# Altium PCB SmartHelmet.PcbDoc (part 1 of 2)
Units mm, origin at the board's own origin, x right, y up, seen from the top; angles counter-clockwise.
Board outline 33.86 x 37.02 mm, 6 copper layers (Top Layer, GND, SIGNAL, POWER, GND 2, Bottom Layer), stack 1.538 mm thick; 65 components, 48 nets, 312 pads, 182 vias.
Unrouted connection lines stored in the file: 104.
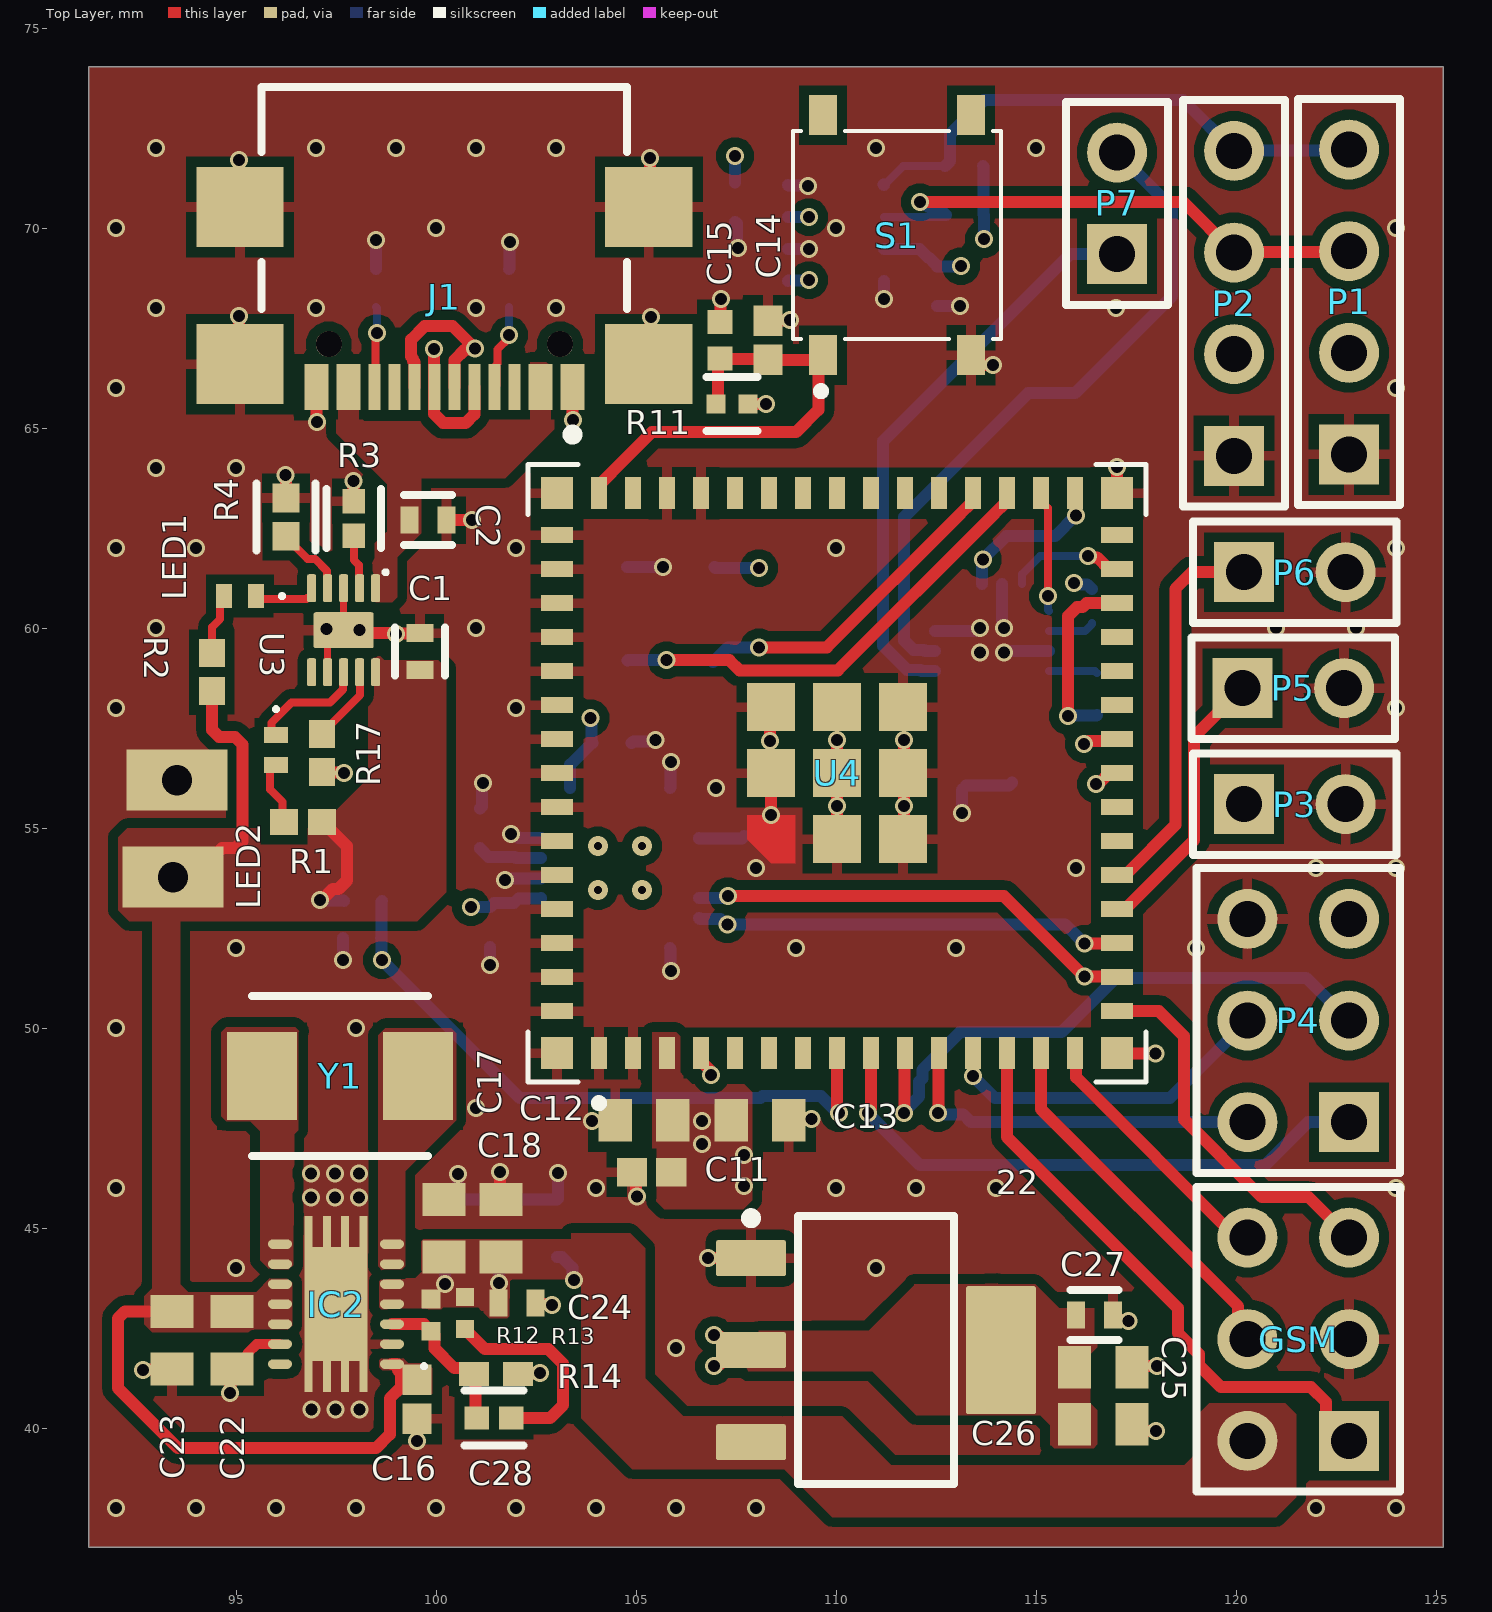
[diagram p0: Top Layer view]
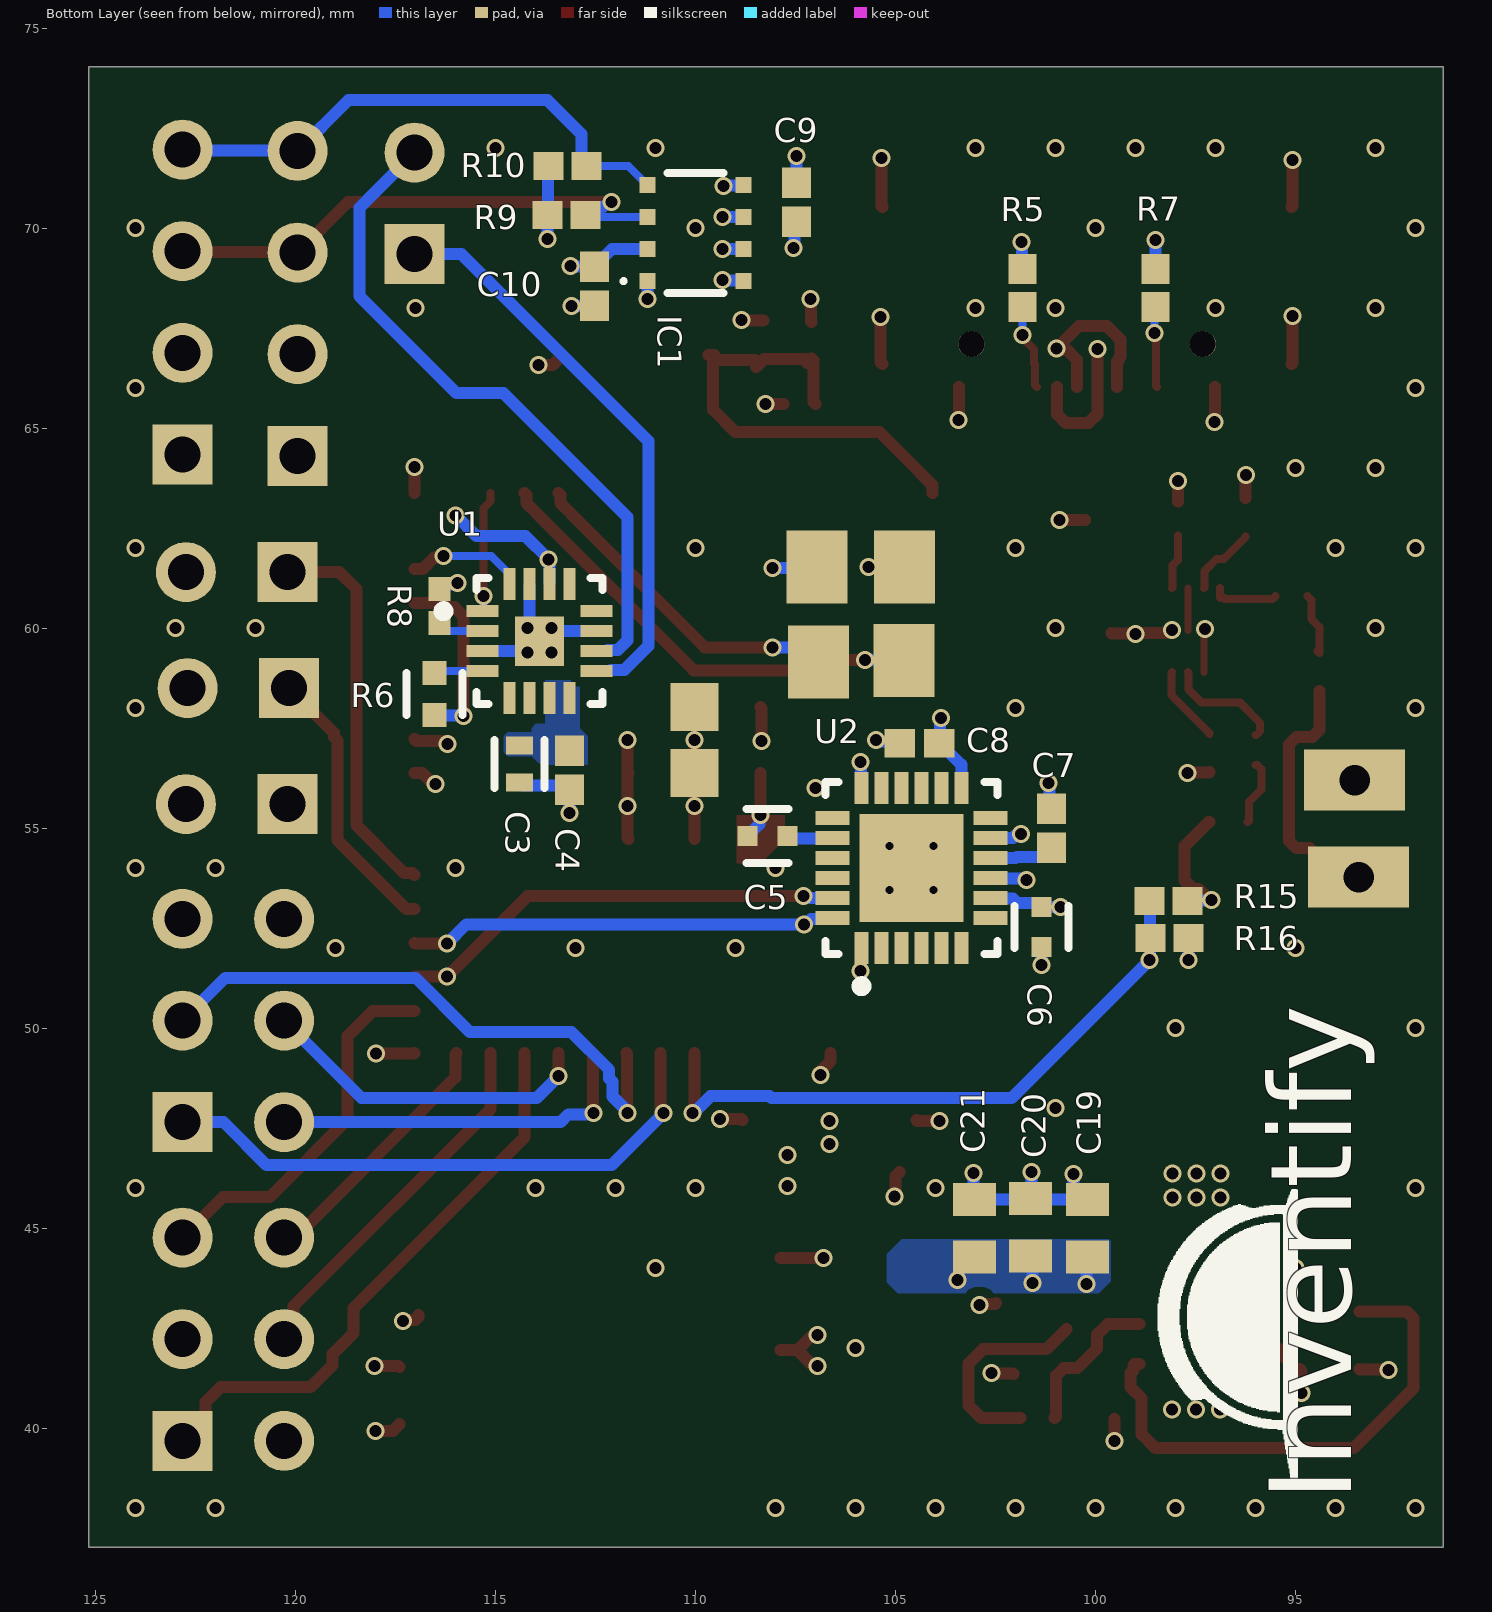
[diagram p1: Bottom Layer view, seen from below]
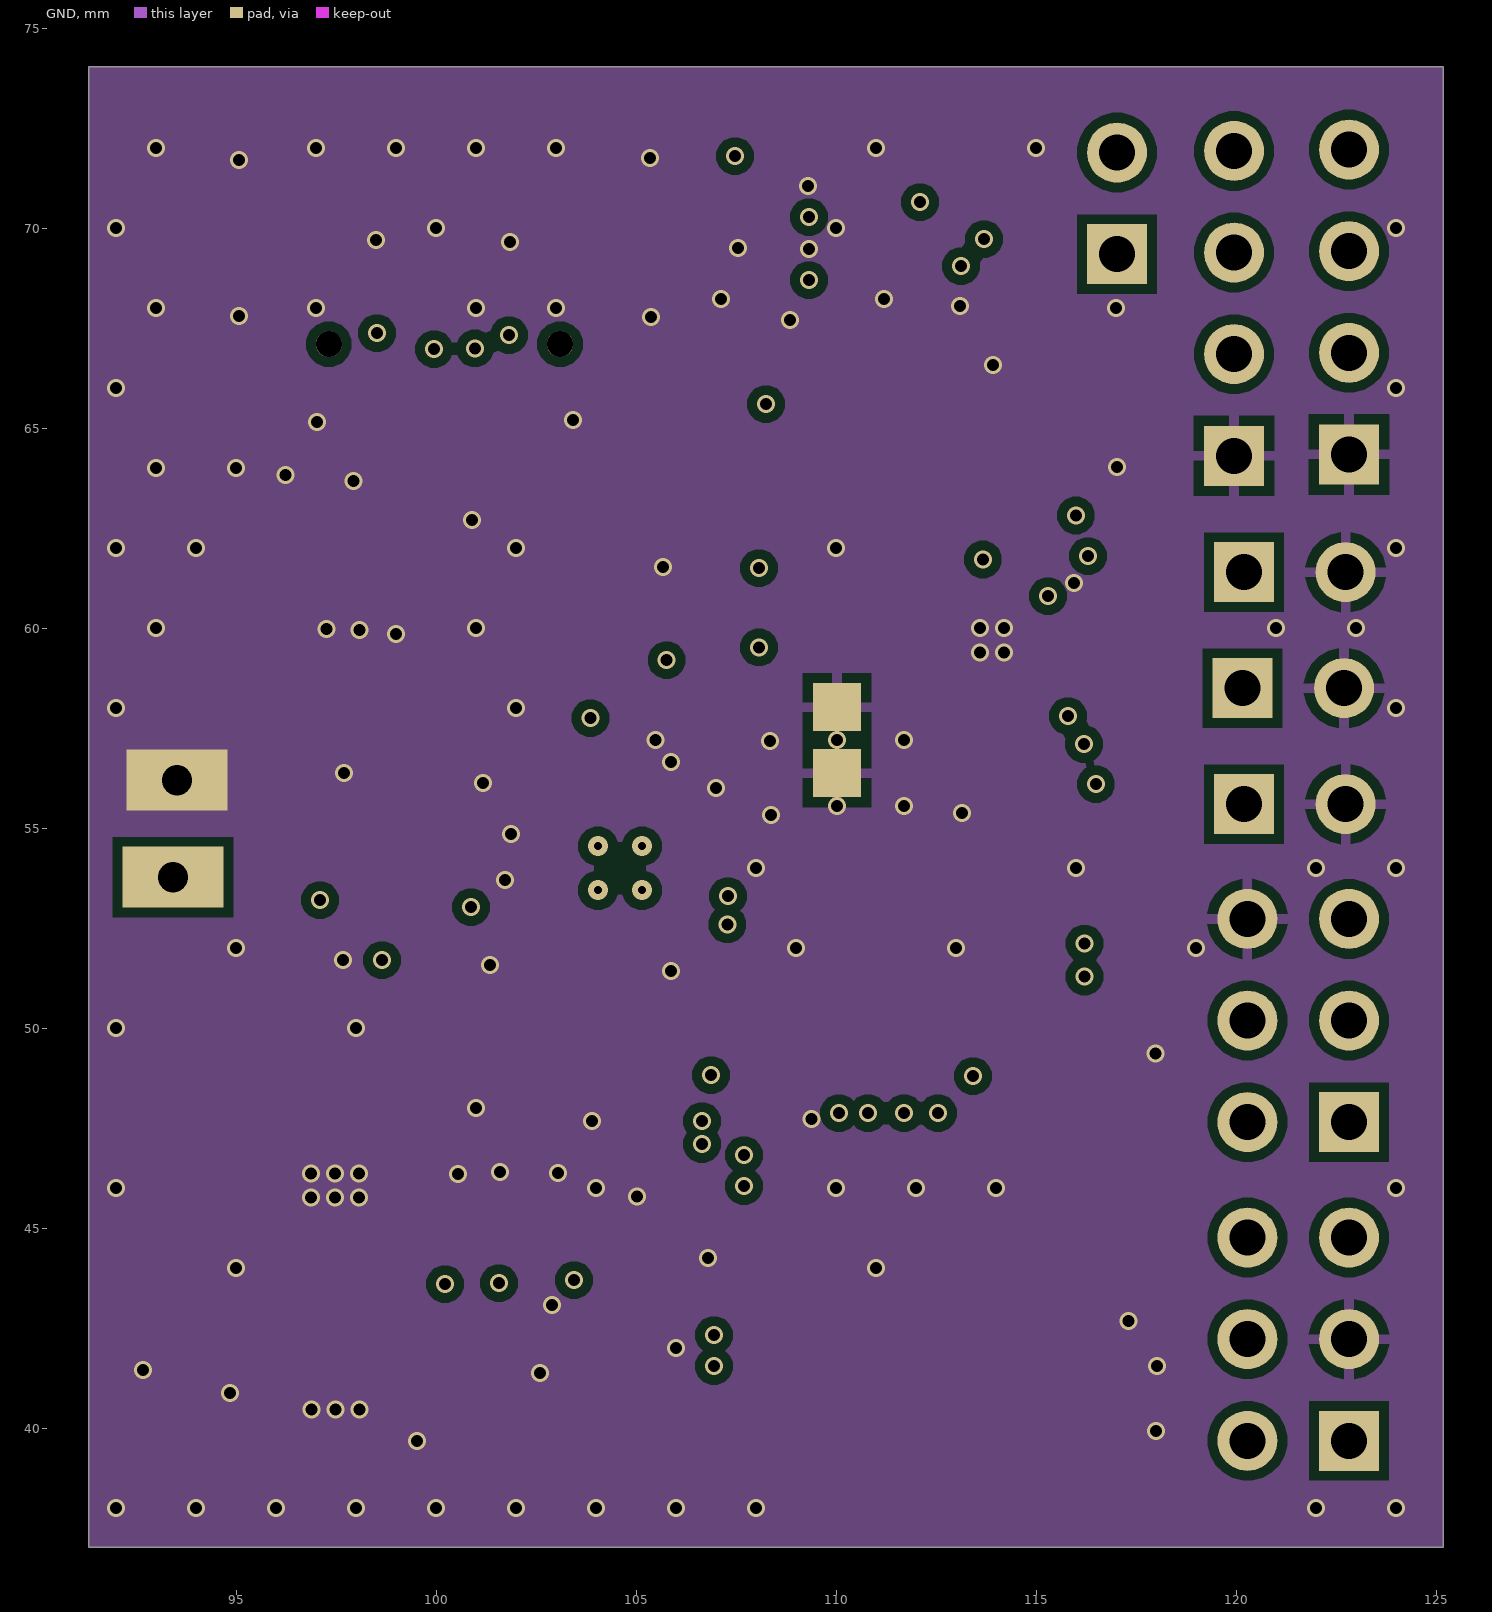
[diagram p2: GND]
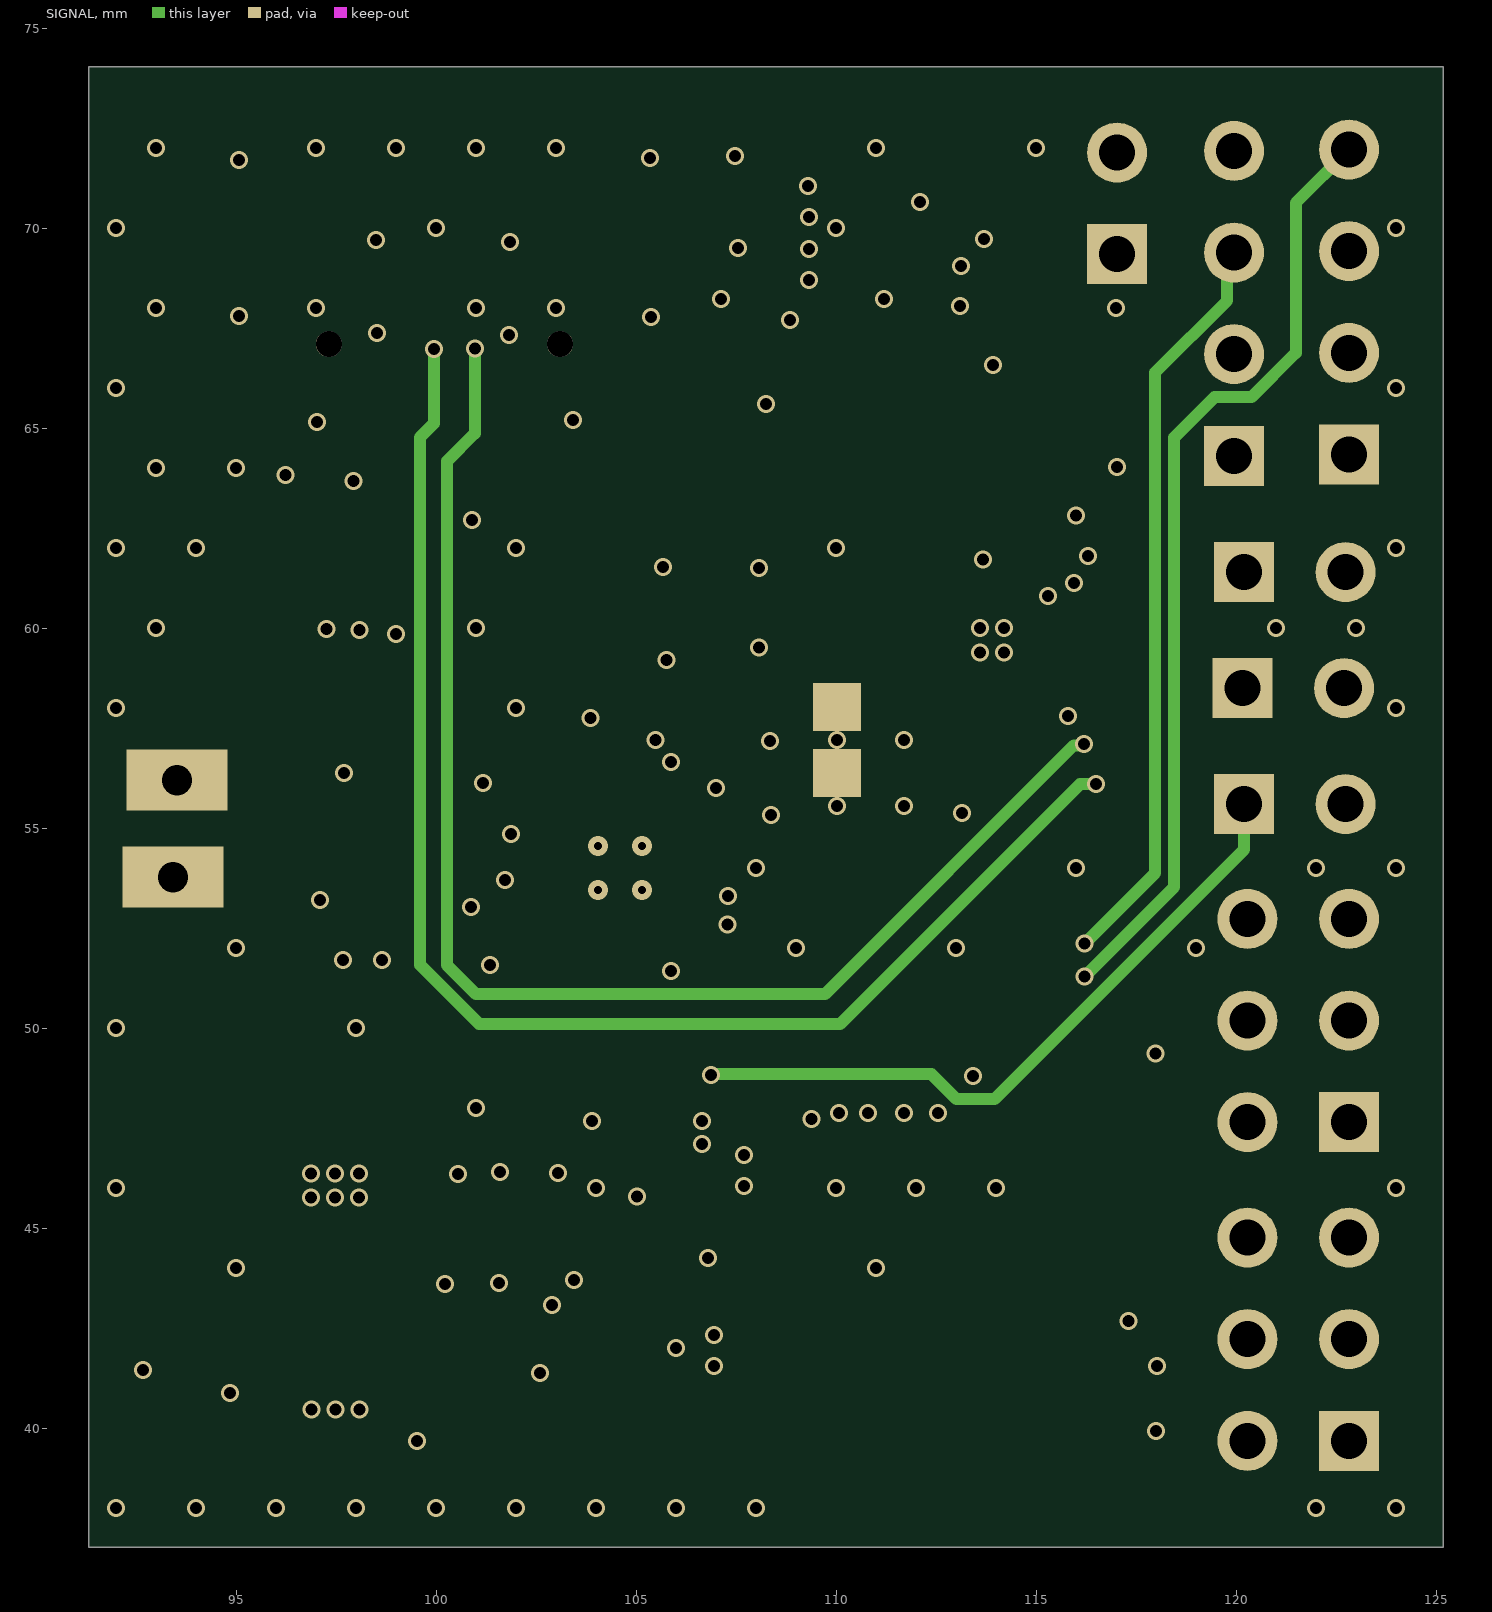
[diagram p3: SIGNAL]
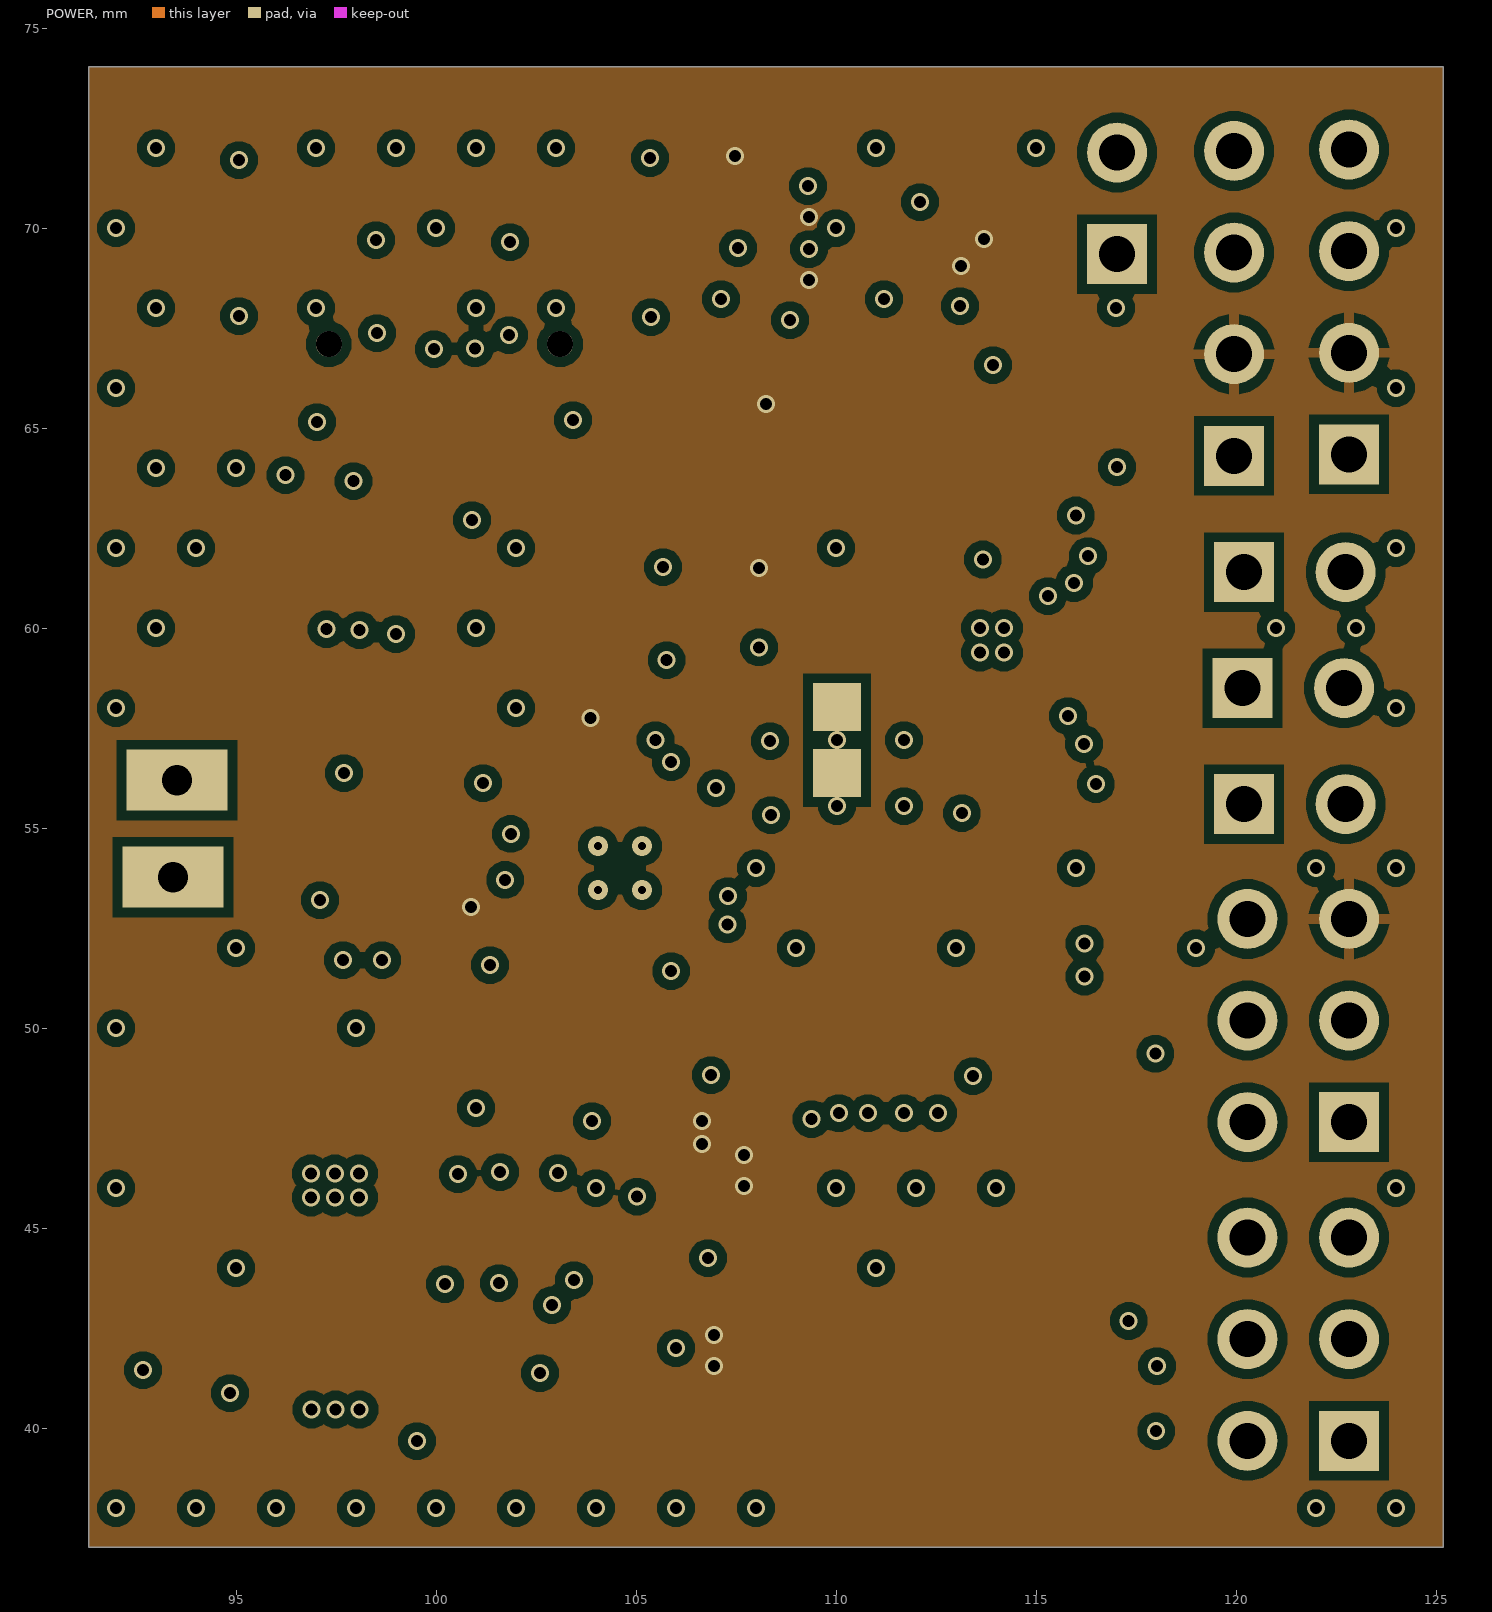
[diagram p4: POWER]
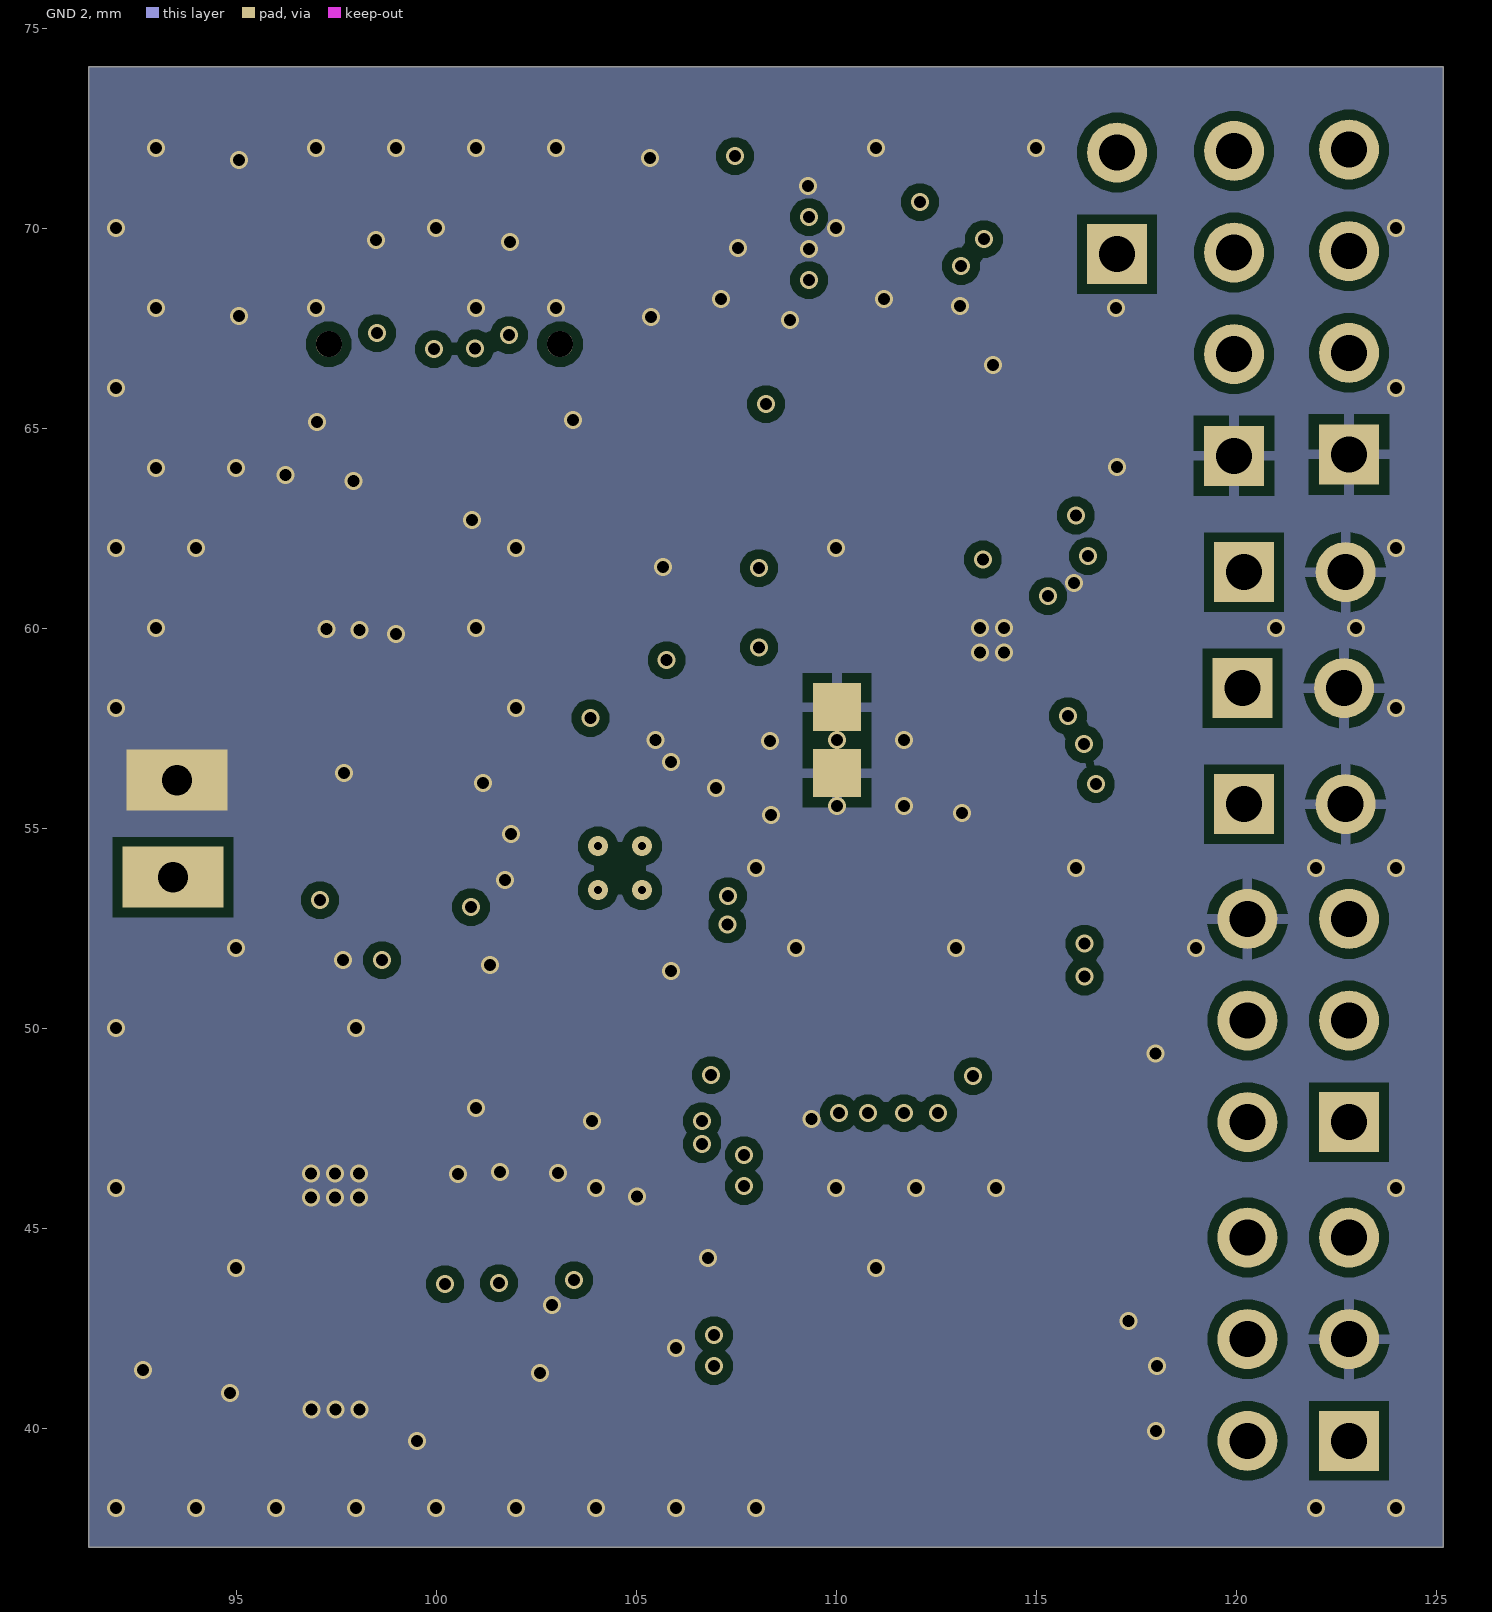
[diagram p5: GND 2]
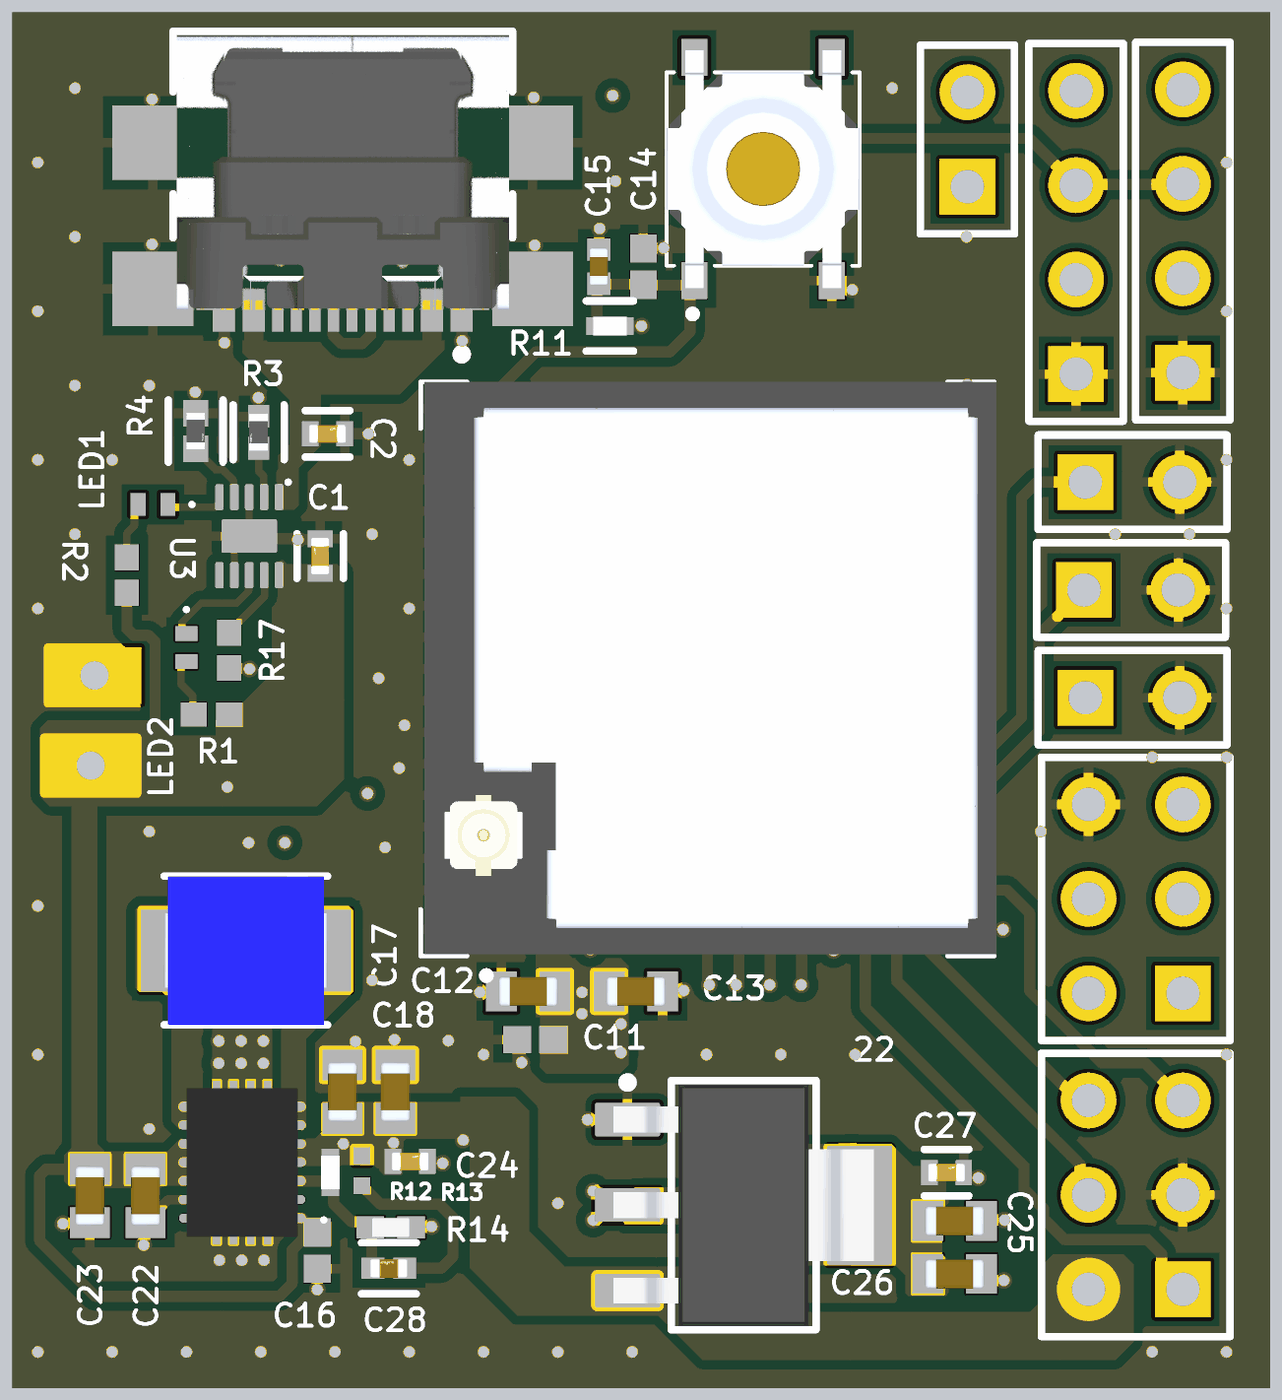
[diagram p6: 3D render of the assembled board from above, using the file's embedded part models]

## Layer stack, top to bottom
Top Solder: solder mask 0.0102, Solder Resist, Dk 3.8
Top Layer: signal copper 0.035
PREPREG1: prepreg 0.0994, PP-015, Dk 4.1
GND: signal copper 0.0152
CORE1: core 0.55, Core-009, Dk 4.6
SIGNAL: signal copper 0.0152
PREPREG2: prepreg 0.1088, PP-016, Dk 4.16
POWER: signal copper 0.0152
CORE2: core 0.55, Core-009, Dk 4.6
GND 2: signal copper 0.0152
PREPREG3: prepreg 0.0994, PP-015, Dk 4.1
Bottom Layer: signal copper 0.035
Bottom Solder: solder mask 0.0102, Solder Resist, Dk 3.8

## Board outline
91.313,37.025 125.175,37.025 125.175,74.041 91.313,74.041

## Design rules (kind name [scope] priority, off if disabled: settings)
Clearance "Stitching GND" [IsStitchingVia and InNet('GND') vs (IsVia and (Not IsStitchingVia)) Or IsPad] p1: gap=0.2 ignorepadtopadclearanceinfootprint=FALSE
Clearance [All] p2: gap=0.17 ignorepadtopadclearanceinfootprint=FALSE except(0.15: SMDPad-SMDPad; 0.2: Arc-Via Track-Via; 0.24: Arc-Fill Arc-Poly Arc-Region Track-Fill Track-Poly Track-Region SMDPad-Fill SMDPad-Poly SMDPad-Region THPad-Fill THPad-Poly THPad-Region Via-Fill Via-Poly Via-Region Fill-Fill Fill-Poly Fill-Region Poly-Poly Poly-Region Region-Region; 0.254: Via-Via)
ComponentClearance [All] p1: gap=0.1 collisioncheckmode=3 verticalgap=0.1 showdistances=FALSE
MinimumSolderMaskSliver [All] p1: minsoldermaskwidth=0.05
PolygonConnect [All] p1: connectstyle=Relief reliefconductorwidth=0.254 reliefentries=4 polygonreliefangle="90 Angle" airgapwidth=0.254
RoutingVias [All] p1: holewidth=0.711 width=1.27 viastyle="Through Hole" minholewidth=0.711 minwidth=1.27 maxholewidth=0.711 maxwidth=1.27
SolderMaskExpansion [All] p1: expansion=0.102 istentingtop=FALSE
Width [All] p1: maxlimit=0.3 minlimit=0.18 preferedwidth=0.2
28 further rules are at their usual default settings.

## Components (designator, comment, footprint, x,y, rotation, side; value= is the part's Value field where it differs from the comment)
22 "TLV1117LV33DCYR" DCY0004A_N 111,41.95 r0 top (schematic designator U6)
C1 "CL05A106MP5NUNC" FP-CL05A106MP5NUNC-MFG 99.6,59.412 r90 top value=10uF
C2 "CL05A106MP5NUNC" FP-CL05A106MP5NUNC-MFG 99.8,62.7 r0 top value=10uF
C3 "CL05A106MP5NUNC" FP-CL05A106MP5NUNC-MFG 114.4,56.6 r90 bottom value=10uF
C4 "CL05B104KO5NNNC" CAPC1050X55X23ML05T13#1 113.15,56.45 r90 bottom
C5 "CC0402KRX7R9BB222" FP-CC0402-MFG 108.2,54.8 r0 bottom value="2.2 nF"
C6 "CC0402KRX7R9BB103" FP-CC0402-MFG 101.35,52.525 r270 bottom value="10 nF"
C7 "CL05B104KO5NNNC" CAPC1050X55X23ML05T13#1 101.1,55 r270 bottom
C8 "CL05B104KO5NNNC" CAPC1050X55X23ML05T13#2 104.4,57.125 r180 bottom
C9 "CL05B104KO5NNNC" CAPC1050X55X23ML05T13#2 107.475,70.65 r270 bottom
C10 "CL05B104KO5NNNC" CAPC1050X55X23ML05T13#2 112.525,68.55 r270 bottom
C11 "CL05B104KO5NNNC" CAPC1050X55X23ML05T13#3 105.39,46.4 r0 top
C12 "CL10A226MP8NUNE" CAPC1608X105N#1 105.2,47.7 r180 top value=22uF
C13 "CL10A226MP8NUNE" CAPC1608X105N#1 108.1,47.7 r0 top value=22uF
C14 "CL05B104KO5NNNC" CAPC1050X55X23ML05T13#3 108.3,67.2 r90 top
C15 "GRM155C71C105KE11J" CAPC1005X55N 107.1,67.2 r270 top
C16 "CL05B104KO5NNNC" CAPC1050X55X23ML05T13#3 99.525,40.725 r90 top
C17 "CL10A226MP8NUNE" CAPC1608X105N#2 100.2,45 r90 top value=22uF
C18 "CL10A226MP8NUNE" CAPC1608X105N#3 101.625,45 r270 top value=22uF
C19 "CL10A226MP8NUNE" CAPC1608X105N#4 100.2,45 r270 bottom value=22uF
C20 "CL10A226MP8NUNE" CAPC1608X105N#4 101.625,45.025 r270 bottom value=22uF
C21 "CL10A226MP8NUNE" CAPC1608X105N#4 103.025,45 r270 bottom value=22uF
C22 "CL10A226MP8NUNE" CAPC1608X105N#4 94.9,42.2 r270 top value=22uF
C23 "CL10A226MP8NUNE" CAPC1608X105N#4 93.4,42.2 r270 top value=22uF
C24 "CL05A106MP5NUNC" FP-CL05A106MP5NUNC-MFG 102.025,43.125 r0 top value=10uF
C25 "CL10A226MP8NUNE" CAPC1608X105N#4 116.68,41.525 r180 top value=22uF
C26 "CL10A226MP8NUNE" CAPC1608X105N#4 116.68,40.1 r180 top value=22uF
C27 "CL05A106MP5NUNC" FP-CL05A106MP5NUNC-MFG 116.463,42.825 r0 top value=10uF
C28 "GCQ1555C1H4R7BB01D" FP-GCQ155-0_05-IPC_B 101.45,40.25 r180 top
GSM "Header 3X2" HDR2X3 122.825,39.685 r90 top
IC1 "BME680" BME680 110,69.875 r180 bottom
IC2 "TPS63020DSJR" TPS63020DSJR 97.5,43.1 r90 top
J1 "USB4110-GF-A" FP-USB4110-GF-A-MFG 100.21,69.705 r180 top
LED1 "NCD0402G1" NCD0402R1#1 95.1,60.8 r180 top
LED2 "NCD0402R1" NCD0402R1#2 96,56.925 r270 top
P1 "Header 4" HDR1X4 122.825,64.345 r90 top
P2 "Header 4" HDR1X4 119.95,64.31 r90 top
P3 "Header 2" HDR1X2 120.2,55.6 r0 top
P4 "Header 3X2" HDR2X3 122.825,47.65 r90 top
P5 "Header 2" HDR1X2 120.16,58.5 r0 top
P6 "Header 2" HDR1X2 120.2,61.4 r0 top
P7 "Header 2" HDR1X2 117.025,69.35 r90 top
R1 "RC0402FR-071K5L" RESC1005X40X25ML05T10 96.675,55.15 r0 top value=1.5k
R2 "RC0402FR-071K5L" RESC1005X40X25ML05T10 94.4,58.9 r270 top value=1.5k
R3 "AC0402FR-07549RL" FP-AC0402-IPC_B 97.944,62.742 r270 top
R4 "RC0402FR-071KL" FP-RC0402-0_4-IPC_A 96.25,62.775 r270 top
R5 "RK73H1ETTP5101F" RESC1005X40X25ML10T10#1 101.825,68.5 r270 bottom
R6 "CRCW04021K00FKED" FP-CRCW0402-e3-MFG 116.525,58.35 r90 bottom
R7 "RK73H1ETTP5101F" RESC1005X40X25ML10T10#1 98.5,68.5 r90 bottom
R8 "RC0402FR-07100KL" RESC1005X40X25NL05T10 116.4,60.55 r270 bottom
R9 "RK73H1ETTP5101F" RESC1005X40X25ML10T10#2 113.225,70.325 r0 bottom
R10 "RK73H1ETTP5101F" RESC1005X40X25ML10T10#2 113.2,71.55 r0 bottom
R11 "CRCW040210K0FKEE" FP-CRCW0402-e3-IPC_C 107.4,65.6 r0 top
R12 "CRCW04021M24FKED" FP-CRCW0402-e3-IPC_C 99.875,42.825 r90 top
R13 "CRCW040268K0FKED" RESC1005X40X25LL05T05 100.725,42.875 r90 top
R14 "CRCW0402180KFKED" RESC1005X40N 101.5,41.35 r0 top
R15 "RK73H1ETTP5101F" RESC1005X40X25ML10T10#1 98.175,53.175 r180 bottom
R16 "RK73H1ETTP5101F" RESC1005X40X25ML10T10#1 98.15,52.25 r0 bottom
R17 "RC0402FR-0710KL" RESC1005X40X25ML05T10 97.15,56.875 r90 top value=10k
S1 "PTS526_SK15_SMTR2_LFS" PTS526SK15SMTR2LFS 111.525,69.825 r90 top
U1 "MAX98357AETE+T" FP-T1633-4-MFG 113.9,59.675 r180 bottom
U2 "MPU-6050" IS-QFN-24_V 104.6,54 r90 bottom
U3 "BQ24040DSQR" DSQ0010A_V 97.69,59.948 r270 top
U4 "ESP32-S3-MINI-1U-N8" XCVR_ESP32-S3-MINI-1U-N8 110.025,56.375 r90 top
Y1 "AMDLA4020Q-1R5MT" INDPM4440X200N 97.6,48.8 r0 top

## Footprints (in the part's own frame and the unit in brackets; to place one, negate y for a bottom-side part, rotate by r counter-clockwise, add the part's x,y. Pads: shape width x height; smd on the part's side, far side on the other; paste and mask are expansions set on the pad)
BME680 [mm]
  rect 0.4x0.4 smd paste+0 mask+0.05: 1(-1.2,-1.2) 2(-1.2,-0.4) 3(-1.2,0.4) 4(-1.2,1.2) 5(1.2,1.2) 6(1.2,0.4) 7(1.2,-0.4) 8(1.2,-1.2)
  silkscreen extent -1.85,-1.5 0.7,1.5, body extent -1.5,-1.5 1.5,1.5, height 1.1
CAPC1005X55N [mm]
  rect 0.6x0.62 smd mask+0.02: 1(-0.46,0) 2(0.46,0)
  body extent -0.5,-0.25 0.5,0.25, height 0.55
CAPC1050X55X23ML05T13#1 [mm] "Chip Capacitor, 2-Leads, Body 1.05x0.55mm, IPC Low Density"
  rect 0.76x0.72 smd mask+0.05: 1(-0.49,0) 2(0.49,0)
  body extent -0.53,-0.28 0.53,0.27, height 0.55
CAPC1050X55X23ML05T13#2 [mm] "Chip Capacitor, 2-Leads, Body 1.05x0.55mm, IPC Low Density"
  rect 0.76x0.72 smd paste+0 mask+0.05: 1(-0.49,0) 2(0.49,0)
  body extent -0.53,-0.28 0.53,0.27, height 0.55
CAPC1050X55X23ML05T13#3 [mm] "Chip Capacitor, 2-Leads, Body 1.05x0.55mm, IPC Low Density"
  rect 0.76x0.72 smd mask+0.02: 1(-0.49,0) 2(0.49,0)
  body extent -0.53,-0.28 0.53,0.27, height 0.55
CAPC1608X105N#1 [mm]
  rect 0.83x1.07 smd: 1(-0.72,0) 2(0.72,0)
  body extent -0.8,-0.4 0.8,0.4, height 1.05
CAPC1608X105N#2 [mm]
  rect 0.83x1.07 smd mask+0.05: 1(-0.72,0)
  rect 0.83x1.07 smd: 2(0.72,0)
  body extent -0.8,-0.4 0.8,0.4, height 1.05
CAPC1608X105N#3 [mm]
  rect 0.83x1.07 smd: 1(-0.72,0)
  rect 0.83x1.07 smd mask+0.05: 2(0.72,0)
  body extent -0.8,-0.4 0.8,0.4, height 1.05
CAPC1608X105N#4 [mm]
  rect 0.83x1.07 smd mask+0.05: 1(-0.72,0) 2(0.72,0)
  body extent -0.8,-0.4 0.8,0.4, height 1.05
DCY0004A_N [mm] "SOT223, 4-Leads, Body 6.7x3.7mm, Pitch 2.3mm, IPC Medium Density"
  rrect11% 1.75x0.9 smd: 2(-3.125,0) 3(-3.125,-2.3) 322(-3.125,2.3)
  rrect6% 1.75x3.2 smd: 4(3.125,0)
  silkscreen extent -3.25,-3.35 1.95,3.42, body extent -3.5,-3.25 3.5,3.25, height 1.62
DSQ0010A_V [mm] "SON, 10-Leads, Body 2x2mm, Pitch 0.4mm, Thermal Pad 1.5x0.9mm"
  rrect43% 0.7x0.23 smd mask+0.005: 1(-1.05,0.8) 2(-1.05,0.4) 3(-1.05,0) 4(-1.05,-0.4) 5(-1.05,-0.8) 6(1.05,-0.8) 7(1.05,-0.4) 8(1.05,0) 9(1.05,0.4) 10(1.05,0.8)
  rrect11% 0.9x1.5 smd mask+0.005: 11(0,0)
  silkscreen extent -1.5,1 -1.4,1.1, body extent -1,-1 1,1, height 0.8
FP-AC0402-IPC_B [mm]
  rect 0.615x0.572 smd paste+0 mask+0: 1(-0.429,0) 2(0.429,0)
  silkscreen extent -0.74,-0.69 0.74,0.69, body extent -0.5,-0.25 0.5,0.25, height 0.37
FP-CC0402-MFG [mm]
  rect 0.5x0.5 smd paste+0 mask+0: 1(-0.5,0) 2(0.5,0)
  silkscreen extent -0.53,-0.68 0.53,0.67, body extent -0.5,-0.25 0.5,0.25, height 0.55
FP-CL05A106MP5NUNC-MFG [mm]
  rect 0.45x0.675 smd paste+0 mask+0: 1(-0.463,0) 2(0.463,0)
  silkscreen extent -0.6,-0.63 0.6,0.63, body extent -0.5,-0.25 0.5,0.25, height 0.7
FP-CRCW0402-e3-IPC_C [mm]
  rect 0.468x0.472 smd paste+0 mask+0: 1(-0.402,0) 2(0.402,0)
  silkscreen extent -0.64,-0.67 0.64,0.67, body extent -0.74,-0.38 0.74,0.38, height 0.25
FP-CRCW0402-e3-MFG [mm]
  rect 0.6x0.6 smd paste+0 mask+0: 1(-0.525,0) 2(0.525,0)
  silkscreen extent -0.53,-0.7 0.53,0.7, body extent -0.5,-0.25 0.5,0.25, height 0.4
FP-GCQ155-0_05-IPC_B [mm]
  rect 0.615x0.572 smd paste+0 mask+0: 1(-0.429,0) 2(0.429,0)
  silkscreen extent -0.74,-0.69 0.74,0.69, body extent -0.89,-0.44 0.89,0.44, height 0.25
FP-RC0402-0_4-IPC_A [mm]
  rect 0.715x0.672 smd paste+0 mask+0: 1(-0.479,0) 2(0.479,0)
  silkscreen extent -0.84,-0.74 0.84,0.74, body extent -0.5,-0.25 0.5,0.25, height 0.4
FP-T1633-4-MFG [mm]
  rect 0.8x0.3 smd paste+0 mask+0: 1(-1.425,0.75) 2(-1.425,0.25) 3(-1.425,-0.25) 4(-1.425,-0.75) 9(1.425,-0.75) 10(1.425,-0.25) 11(1.425,0.25) 12(1.425,0.75)
  rect 0.3x0.8 smd paste+0 mask+0: 5(-0.75,-1.425) 6(-0.25,-1.425) 7(0.25,-1.425) 8(0.75,-1.425) 13(0.75,1.425) 14(0.25,1.425) 15(-0.25,1.425) 16(-0.75,1.425)
  rect 1.23x1.23 smd paste+0 mask+0: 17(0,0)
  silkscreen extent -2.53,-1.58 1.58,1.58, body extent -1.5,-1.5 1.5,1.5, height 0.8
FP-USB4110-GF-A-MFG [mm]
  rect 2.18x2 smd paste+0 mask+0: 1(-5.11,3.105) 2(5.11,3.105) 3(-5.11,-0.825) 4(5.11,-0.825)
  rect 0.6x1.15 smd paste+0 mask+0: A1-B12(-3.2,3.68) A4-B9(-2.4,3.68) B1-A12(3.2,3.68) B4-A9(2.4,3.68)
  rect 0.3x1.15 smd paste+0 mask+0: A5(-1.25,3.68) A6(-0.25,3.68) A7(0.25,3.68) A8(1.25,3.68) B5(1.75,3.68) B6(0.75,3.68) B7(-0.75,3.68) B8(-1.75,3.68)
  round 0.65 hole 0.65 unplated paste-1000 mask+0: ""(-2.89,2.605) ""(2.89,2.605)
  silkscreen extent -4.57,-3.83 4.57,4.99, body extent -5.65,-3.67 5.65,4.01, height 3.21
HDR1X2 [mm] "Connector; Header; 2 Position"
  rect 1.5x1.5 hole 0.9: 1(0,0)
  round 1.5 hole 0.9: 2(2.54,0)
  silkscreen extent -1.27,-1.27 3.81,1.27
HDR1X4 [mm] "Connector; Header; 4 Position"
  rect 1.5x1.5 hole 0.9: 1(0,0)
  round 1.5 hole 0.9: 2(2.54,0) 3(5.08,0) 4(7.62,0)
  silkscreen extent -1.27,-1.27 8.89,1.27
HDR2X3 [mm] "Connector; Header; 3x2 Position"
  rect 1.5x1.5 hole 0.9: 1(0,0)
  round 1.5 hole 0.9: 2(0,2.54) 3(2.54,0) 4(2.54,2.54) 5(5.08,0) 6(5.08,2.54)
  silkscreen extent -1.27,-1.27 6.35,3.81
INDPM4440X200N [mm]
  rect 1.75x2.2 smd: 1(-1.95,0) 2(1.95,0)
  silkscreen extent -2.2,-2 2.2,2, body extent -2.2,-2 2.2,2, height 2
IS-QFN-24_V [mm] "QFN, 24-Leads, Body 4x4mm, Pitch 0.5mm, Thermal Pad 2.7x2.6mm"
  rect 0.8x0.35 smd mask+0.02: 1(-2,1.25) 2(-2,0.75) 3(-2,0.25) 4(-2,-0.25) 5(-2,-0.75) 6(-2,-1.25) 13(2,-1.25) 14(2,-0.75) 15(2,-0.25) 16(2,0.25) 17(2,0.75) 18(2,1.25)
  rect 0.35x0.85 smd mask+0.02: 7(-1.25,-1.975) 8(-0.75,-1.975) 9(-0.25,-1.975) 10(0.25,-1.975) 11(0.75,-1.975) 12(1.25,-1.975) 19(1.25,1.975) 20(0.75,1.975) 21(0.25,1.975) 22(-0.25,1.975) 23(-0.75,1.975) 24(-1.25,1.975)
  rect 2.7x2.6 smd mask+0.02: 25(0,0)
  silkscreen extent -3.07,-2.15 2.15,2.15, body extent -2,-2 2,2, height 0.95
NCD0402R1#1 [mm]
  rect 0.4x0.6 smd: 1(-0.4,0) 2(0.4,0)
  silkscreen extent -1.1,-0.05 -1,0.05
NCD0402R1#2 [mm]
  rect 0.4x0.6 smd mask+0.05: 1(-0.4,0) 2(0.35,0)
  silkscreen extent -1.1,-0.05 -1,0.05
PTS526SK15SMTR2LFS [mm]
  rect 1x0.7 smd mask+0.02: 1(-3,1.85)
  rect 1x0.7 smd: 2(3,1.85) 4(3,-1.85)
  rect 1x0.7 smd mask+0.05: 3(-3,-1.85)
  silkscreen extent -4,-2.6 2.6,2.6, body extent -3.2,-2.6 3.2,2.6, height 1.55
RESC1005X40N [mm]
  rect 0.75x0.6 smd mask+0.05: 1(-0.55,0) 2(0.55,0)
  body extent -0.5,-0.25 0.5,0.25, height 0.35
RESC1005X40X25LL05T05 [mm] "Chip Resistor, 2-Leads, Body 1.00x0.50mm, IPC High Density"
  rect 0.45x0.45 smd mask+0.02: 1(-0.4,0)
  rect 0.45x0.45 smd: 2(0.4,0)
  body extent -0.53,-0.27 0.53,0.28, height 0.4
RESC1005X40X25ML05T10 [mm] "Chip Resistor, 2-Leads, Body 1.00x0.50mm, IPC Low Density"
  rect 0.7x0.65 smd mask+0.02: 1(-0.475,0) 2(0.475,0)
  body extent -0.53,-0.27 0.53,0.28, height 0.4
RESC1005X40X25ML10T10#1 [mm] "Chip Resistor, 2-Leads, Body 1.00x0.50mm, IPC Low Density"
  rect 0.75x0.7 smd mask+0.05: 1(-0.475,0) 2(0.475,0)
  body extent -0.55,-0.3 0.55,0.3, height 0.4
RESC1005X40X25ML10T10#2 [mm] "Chip Resistor, 2-Leads, Body 1.00x0.50mm, IPC Low Density"
  rect 0.75x0.7 smd paste+0 mask+0.05: 1(-0.475,0) 2(0.475,0)
  body extent -0.55,-0.3 0.55,0.3, height 0.4
RESC1005X40X25NL05T10 [mm] "Chip Resistor, 2-Leads, Body 1.00x0.50mm, IPC Medium Density"
  rect 0.6x0.55 smd mask+0.05: 1(-0.425,0) 2(0.425,0)
  body extent -0.53,-0.27 0.53,0.28, height 0.4
TPS63020DSJR [mm]
  rrect100% 0.24x0.6 smd mask+0.02: 1(-1.5,-1.4) 2(-1,-1.4) 3(-0.5,-1.4) 3(1,-1.4) 4(0,-1.4) 5(0.5,-1.4) 7(1.5,-1.4) 8(1.5,1.4) 9(1,1.4) 10(0.5,1.4) 11(0,1.4) 12(-0.5,1.4) 13(-1,1.4) 14(-1.5,1.4)
  rect 2.85x1.58 smd: 15(0,0)
  rect 0.775x0.2 smd mask+0.05: 16(-1.813,0.69) 17(-1.813,0.23) 18(-1.813,-0.23) 19(-1.813,-0.69) 20(1.813,-0.69) 21(1.813,-0.23) 22(1.813,0.23) 23(1.813,0.69)
  silkscreen extent -1.6,-2.25 -1.5,-2.15, body extent -2,-1.5 2,1.5, height 1
XCVR_ESP32-S3-MINI-1U-N8 [mm]
  rect 0.8x0.4 smd mask+0.05: 1(-7,5.95) 2(-7,5.1) 3(-7,4.25) 4(-7,3.4) 5(-7,2.55) 6(-7,1.7) 7(-7,0.85) 8(-7,0) 9(-7,-0.85) 10(-7,-1.7) 11(-7,-2.55) 12(-7,-3.4) 13(-7,-4.25) 14(-7,-5.1) 15(-7,-5.95) 31(7,-5.95) 32(7,-5.1) 33(7,-4.25) 34(7,-3.4) 35(7,-2.55) 36(7,-1.7) 37(7,-0.85) 38(7,0) 39(7,0.85) 40(7,1.7) 41(7,2.55) 42(7,3.4) 43(7,4.25) 44(7,5.1) 45(7,5.95)
  rect 0.4x0.8 smd mask+0.05: 16(-5.95,-7) 17(-5.1,-7) 18(-4.25,-7) 19(-3.4,-7) 20(-2.55,-7) 21(-1.7,-7) 22(-0.85,-7) 23(0,-7) 24(0.85,-7) 25(1.7,-7) 26(2.55,-7) 27(3.4,-7) 28(4.25,-7) 29(5.1,-7) 30(5.95,-7) 46(5.95,7) 47(5.1,7) 48(4.25,7) 49(3.4,7) 50(2.55,7) 51(1.7,7) 52(0.85,7) 53(0,7) 54(-0.85,7) 55(-1.7,7) 56(-2.55,7) 57(-3.4,7) 58(-4.25,7) 59(-5.1,7) 60(-5.95,7)
  rect 1.2x1.2 smd mask+0.05: 61_2(0,1.65) 61_3(1.65,1.65) 61_4(-1.65,0) 61_7(-1.65,-1.65) 61_8(0,-1.65) 61_9(1.65,-1.65)
  rect 0.8x0.8 smd mask+0.05: 62(-7,7) 63(-7,-7) 64(7,-7) 65(7,7)
  Top Layer region: -1.05,1.05 -2.25,1.05 -2.25,1.65 -1.65,2.25 -1.05,2.25
  silkscreen extent -8.35,-7.72 7.72,7.72, body extent -7.68,-7.78 7.72,7.62, height 2.55

## Part data
22: library part CMP-0395-00503-2, "Single Output LDO, 1 A, Fixed 3.3 V Output, 2 to 5.5 V Input, 4-pin SOT-223 (DCY), -40 to 125 degC, Green (RoHS & no Sb/Br)", Manufacturer="Texas Instruments", Accuracy(%)=2, Code_JEDEC=TO-261, ComponentLink1Description="Manufacturer URL", ComponentLink1URL=http://www.ti.com/, ComponentLink2Description=Datasheet, ComponentLink2URL=http://www.ti.com/general/docs/lit/getliterature.tsp?genericPartNumber=TLV1117LV33&fileType=pdf, ComponentLink3Description="Package Specification", ComponentLink3URL=http://www.ti.com/litv/pdf/mpds094a, DatasheetVersion=SBVS160A, Eco-Plan="Green (RoHS & no Sb/Br)", Fixed Output Options(V)=3.3, Iout(Max)(A)=1, Iq(Typ)(mA)=0.05, Mounting Technology="Surface Mount", PackageDescription="4-Pin Plastic Small Outline, Body 3.5 x 6.5 mm, Pitch 2.3 mm", PackageReference=DCY0004A, PackageVersion=4202506/B, PartNumber=TLV1117LV33DCYR, SubFamily="Single Channel LDO", Vdo(Typ)(mV)=1200, Vin(Max)(V)=5.5, Vin(Min)(V)=2, Vout Adj(Max)(V)=3.3, Vout Adj(Min)(V)=3.3
C1 C2 C3 C24 C27: library part CMP-13271-000002-1, "CAP CER 10UF 10V X5R 0402", Capacitance=10uF, Manufacturer=Samsung, Temperature="-55°C to +85°C", Temperature Characteristic=X5R, Temperature Coefficient=15%, Temperature Range High=+85°C, Temperature Range Low=-55°C, Tolerance=20%, Voltage Rating=10V, Automotive=No, Category=Cap, ComponentLink2Description=Datasheet, ComponentLink2URL=http://www.samsungsem.com/kr/support/product-search/mlcc/__icsFiles/afieldfile/2019/05/10/19-CL05A106MP5NUNC.pdf, Device Class L1="Passive Components", Device Class L2=Capacitors, Device Class L3="Ceramic Capacitors", Digikey Description="CAP CER 10UF 10V X5R 0402", Height=0.7mm, Ipc Land Pattern Name=CAPC10050X50, Lead Free=Yes, Manufacturer Part Number=CL05A106MP5NUNC, Material=Ceramic, Octopart=https://octopart.com/cl05a106mp5nunc-samsung-22457395, Package=CL05A106MP5NUNC, RoHS=TRUE
C4: library part CMP-2000-05439-1, "Chip Capacitor, 100 nF, +/- 10%, 16 V, -55 to 125 degC, 0402 (1005 Metric), RoHS, Tape and Reel", Capacitance=0.1uF, Case Size/Dimension=0402, Dielectric=X7R, Manufacturer="Samsung Electro-Mechanics", Rated Voltage=16V, Tolerance (%)=±10%, Datasheet URL=https://datasheet.ciiva.com/29198/458718-da-01-en-vs-kondensator-0402-29198423.pdf, Datasheet Version=Nov-10, Manufacturer URL=http://www.samsungsem.com/global/index.jsp
C5: library part CMP-1034-01742-2, "CAP CER 2200PF 50V X7R 0402", Capacitance="2.2 nF", Manufacturer=YAGEO, Package=CC0402, Temperature="-55°C to +125°C", Temperature Characteristic=X7R, Temperature Coefficient=30ppm/°C, Temperature Range High=+125°C, Temperature Range Low=-55°C, Tolerance=0.1, Voltage Rating="50 V", Automotive=No, Automotive Grade=NA, Category=Cap, ComponentLink2Description=Datasheet, ComponentLink2URL=http://www.yageo.com/documents/recent/UPY-GP_NP0_16V-to-50V_16.pdf, Device Class L1="Passive Components", Device Class L2=Capacitors, Device Class L3="Ceramic Capacitors", Digikey Description="CAP CER 2200PF 50V X7R 0402", Footprint Url=http://www.yageo.com/exep/pages/download/literatures/UPY-C_GEN_24.pdf, Height=0.55mm, Ipc Land Pattern Name=CAPC10050X50, Lead Free=Yes, Manufacturer Part Number=CC0402KRX7R9BB222, Material=Ceramic, Mouser Description="Multilayer Ceramic Capacitors MLCC - SMD/SMT 2.2nF 50V X7R 10%", Octopart=https://octopart.com/cc0402krx7r9bb222-yageo-39467642, RoHS=TRUE
C6: library part CMP-2100-03592-2, "CAP CER 10000PF 50V X7R 0402", Capacitance="10 nF", Manufacturer=YAGEO, Package=CC0402, Temperature="-55°C to +125°C", Temperature Characteristic=X7R, Temperature Coefficient=30ppm/°C, Temperature Range High=+125°C, Temperature Range Low=-55°C, Tolerance=0.1, Voltage Rating="50 V", Automotive=No, Automotive Grade=NA, Category=Cap, ComponentLink2Description=Datasheet, ComponentLink2URL=http://www.yageo.com/documents/recent/UPY-GP_NP0_16V-to-50V_16.pdf, Device Class L1="Passive Components", Device Class L2=Capacitors, Device Class L3="Ceramic Capacitors", Digikey Description="CAP CER 10000PF 50V X7R 0402", Footprint Url=http://www.yageo.com/exep/pages/download/literatures/UPY-C_GEN_24.pdf, Height=0.55mm, Ipc Land Pattern Name=CAPC10050X50, Lead Free=Yes, Manufacturer Part Number=CC0402KRX7R9BB103, Material=Ceramic, Mouser Description="0402 10 nF 50 V ±10 % Tolerance X7R SMT Multilayer Ceramic Capacitor", Octopart=https://octopart.com/cc0402krx7r9bb103-yageo-8376513, RoHS=TRUE
C7 C8 C9 C10 C11 C14 C16: library part CMP-2000-05439-1, "Chip Capacitor, 100 nF, +/- 10%, 16 V, -55 to 125 degC, 0402 (1005 Metric), RoHS, Tape and Reel", Capacitance=100nF, Case Size/Dimension=0402, Dielectric=X7R, Manufacturer="Samsung Electro-Mechanics", Rated Voltage=16V, Tolerance (%)=±10%, Datasheet URL=https://datasheet.ciiva.com/29198/458718-da-01-en-vs-kondensator-0402-29198423.pdf, Datasheet Version=Nov-10, Manufacturer URL=http://www.samsungsem.com/global/index.jsp
C12 C13 C17 C18 C19 C20 C21 C22 C23 C25 C26: "Capacitor", Manufacturer_Name=SAMSUNG, Mouser Part Number=187-CL10A226MP8NUNE, Arrow Part Number=CL10A226MP8NUNE, Arrow Price/Stock=https://www.arrow.com/en/products/cl10a226mp8nune/samsung-electro-mechanics?region=nac, Datasheet Link=https://datasheet.datasheetarchive.com/originals/distributors/Datasheets-DGA10/2407063.pdf, Height=1.05mm, Manufacturer_Part_Number=CL10A226MP8NUNE, Mouser Price/Stock=https://www.mouser.co.uk/ProductDetail/Samsung-Electro-Mechanics/CL10A226MP8NUNE?qs=gRKWieUq2Hb5O0PTfRKzDQ%3D%3D
C15: "Capacitor", Capacitance=1uF, Manufacturer_Name="Murata Electronics", Mouser Part Number=81-GRM155C71C105KE11, Datasheet Link=http://www.murata.com/~/media/webrenewal/support/library/catalog/products/capacitor/mlcc/c02e.pdf, Height=0.55mm, Manufacturer_Part_Number=GRM155C71C105KE11J, Mouser Price/Stock=https://www.mouser.co.uk/ProductDetail/Murata-Electronics/GRM155C71C105KE11J?qs=pUKx8fyJudDfEc2RwhPUhw%3D%3D
C28: library part CMP-06035-040661-1, "High Q Ceramic Capacitor for Automotive 4.7pF ±0.1pF 50VDC C0G 0402 Paper T/R", Capacitance=4.7pF, Case/Package=0402, Max Operating Temperature=125°C, Min Operating Temperature=-55°C, Ratings=AEC-Q200, Voltage Rating=50V, Mount="Surface Mount", Packaging="Tape and Reel"
GSM P4: "Header, 3-Pin, Dual row", LatestRevisionDate=17-Jul-2002, LatestRevisionNote="Re-released for DXP Platform.", Publisher="Altium Limited"
IC1: "Integrated Circuit", Manufacturer_Name=BOSCH, Mouser Part Number=262-BME680, Arrow Part Number=BME680, Arrow Price/Stock=https://www.arrow.com/en/products/bme680/bosch?region=europe, Datasheet Link=https://www.bosch-sensortec.com/media/boschsensortec/downloads/datasheets/bst-bme680-ds001.pdf, Height=1mm, Manufacturer_Part_Number=BME680, Mouser Price/Stock=https://www.mouser.co.uk/ProductDetail/Bosch-Sensortec/BME680?qs=v271MhAjFHjo0yA%2FC4OnDQ%3D%3D
IC2: "Integrated Circuit", Manufacturer_Name="Texas Instruments", Mouser Part Number=595-TPS63020DSJR, Arrow Part Number=TPS63020DSJR, Arrow Price/Stock=https://www.arrow.com/en/products/tps63020dsjr/texas-instruments?region=nac, Datasheet Link=https://www.ti.com/lit/ds/symlink/tps63020.pdf?HQS=dis-dk-null-digikeymode-dsf-pf-null-wwe&ts=1623612296427, Height=1mm, Manufacturer_Part_Number=TPS63020DSJR, Mouser Price/Stock=https://www.mouser.co.uk/ProductDetail/Texas-Instruments/TPS63020DSJR?qs=C44r%252BX3hXgL3LjjgiOMWew%3D%3D
J1: library part CMP-245163-000002-1, "CONN USB 2.0 TYPE-C R/A SMT", Current Rating=3/4.25/1.25/0.25A, Manufacturer=GCT, Package=0, Temperature="-40°C to +85°C", Temperature Range High=+85°C, Temperature Range Low=-40°C, Voltage Rating=20V, Automotive=No, Category=Conn, ComponentLink2Description=Datasheet, ComponentLink2URL=https://gct.co/files/drawings/usb4110.pdf, Conn Orientation="Right Angle", Contact Material=Gold,Nickel, Device Class L1=Connectors, Device Class L2="USB Connectors", Device Class L3=unset, Digikey Description="CONN USB 2.0 TYPE-C R/A SMT", Height=3.46mm, Is Female=yes, Lead Free=Yes, Manufacturer Part Number=USB4110-GF-A, Number Of Contacts=16, Octopart=https://octopart.com/usb4110-gf-a-gct-103941985, RoHS=TRUE, Shielding=true, Standoff Height=0.1mm, Usb Standard="USB 2.0"
LED1: library part NCD0402R1, "LED  NCD0402G1", Manufacturer_Name="Foshan NationStar Optoelectronics", Datasheet Link=https://datasheet.lcsc.com/lcsc/2008201033_Foshan-NationStar-Optoelectronics-NCD0402R1_C130719.pdf, Height=0.45mm, Manufacturer_Part_Number=NCD0402R1
LED2: "LED", Manufacturer_Name="Foshan NationStar Optoelectronics", Datasheet Link=https://datasheet.lcsc.com/lcsc/2008201033_Foshan-NationStar-Optoelectronics-NCD0402R1_C130719.pdf, Height=0.45mm, Manufacturer_Part_Number=NCD0402R1
P1 P2: "Header, 4-Pin", LatestRevisionDate=17-Jul-2002, LatestRevisionNote="Re-released for DXP Platform.", Publisher="Altium Limited"
P3 P5 P6 P7: "Header, 2-Pin", LatestRevisionDate=17-Jul-2002, LatestRevisionNote="Re-released for DXP Platform.", Publisher="Altium Limited"
R1 R2: library part CMP-2002-07464-1, Manufacturer="Yageo / Phycomp", Part Number=RC0402FR-071K5L
R3: library part CMP-03412-030313-2, "RES 549Ω ±1% 0.063W 0402", Case/Package=0402, Max Operating Temperature=155°C, Max Power Dissipation=63mW, Min Operating Temperature=-55°C, Resistance=549R, Resistor Type="Thick Film", Temperature Coefficient=100ppm/°C, Tolerance=1%, Features="Moisture Resistant", Height=0.015inch, Length=0.039inch, Number of Terminations=2, Packaging="Tape and Reel", RoHS Compliant=Yes, Series=AC, Width=0.02inch
R4: library part CMP-2002-07472-3, "RES 1K OHM 1% 1/16W 0402", Case Code (Imperial)=0402, Case Code (Metric)=1005, Max Operating Temperature=155°C, Max Power Dissipation=63mW, Min Operating Temperature=-55°C, Power Rating=62.5mW, Resistance=1kR, Resistance Tolerance=1%, Resistor Type="Thick Film", Temperature Coefficient=100ppm/°C, Voltage Rating=50V, Case/Package=0402, Construction=Rectangular, Depth=0.5mm, Features="Moisture Resistant", Height=0.32mm, Lead Free="Lead Free", Length=1mm, Military Standard=Not, Number of Pins=2, Number of Terminations=2, Packaging="Tape and Reel", Reach SVHC Compliant=Yes, RoHS Compliant=Yes, Series=RC, Size Code=0402, Technology="THICK FILM", Termination=SMD/SMT, Tolerance=1%, Voltage Rating (DC)=50V, Width=0.5mm
R5 R7 R9 R10 R15 R16: library part CMP-2002-04046-1, Manufacturer="KOA Speer", Resistance=5.1K, Part Number=RK73H1ETTP5101F
R6: library part CMP-2002-08276-2, "RES Thick Film, 1kΩ, 1%, 0.063W, 100ppm/°C, 0402", Case Code (Imperial)=0402, Case Code (Metric)=1005, Max Operating Temperature=155°C, Max Power Dissipation=63mW, Min Operating Temperature=-55°C, Package Quantity=10, Resistance=1kR, Temperature Coefficient=100ppm/°C, Tolerance=1%, Voltage Rating=50V, Case/Package=0402, Composition="Thick Film", Contact Plating=Tin, Depth=0.5mm, Features="Automotive AEC-Q200", Height=0.35mm, Lead Free="Lead Free", Length=1mm, Military Standard=Not, Mount="Surface Mount", Number of Pins=2, Number of Terminations=2, Packaging="Tape and Reel", Power Rating=63mW, Radiation Hardening=No, Termination=SMD/SMT, Voltage Rating (DC)=50V, Weight=2.3E-05oz, Width=0.5mm
R8: library part CMP-2002-07343-1, Manufacturer="Yageo / Phycomp", Resistance=100K, Part Number=RC0402FR-07100KL
R11: library part CMP-1011-00623-2, "RES Thick Film, 10kΩ, 1%, 0.063W, 100ppm/°C, 0402", Case Code (Imperial)=0402, Case Code (Metric)=1005, Max Operating Temperature=155°C, Max Power Dissipation=63mW, Min Operating Temperature=-55°C, Resistance=10kR, Temperature Coefficient=100ppm/°C, Tolerance=1%, Case/Package=0402, Composition="Thick Film", Contact Plating=Tin, Depth=0.5mm, Features="Automotive AEC-Q200", Height=0.016inch, Lead Free="Lead Free", Length=0.039inch, Military Standard=Not, Number of Terminations=2, Packaging="Tape and Reel", Radiation Hardening=No, Width=0.02inch
R12: library part CMP-2002-00298-2, "RES Thick Film, 1.24MΩ, 1%, 0.063W, 100ppm/°C, 0402", Case Code (Imperial)=0402, Case Code (Metric)=1005, Max Operating Temperature=155°C, Max Power Dissipation=63mW, Min Operating Temperature=-55°C, Package Quantity=10, Resistance=1.24MR, Temperature Coefficient=100ppm/°C, Tolerance=1%, Voltage Rating=50V, Case/Package=0402, Composition="Thick Film", Contact Plating=Tin, Depth=0.5mm, Features="Automotive AEC-Q200", Height=0.016inch, Lead Free="Lead Free", Length=1mm, Military Standard=Not, Number of Pins=2, Number of Terminations=2, Packaging="Tape and Reel", Power Rating=63mW, Radiation Hardening=No, Termination=SMD/SMT, Voltage Rating (DC)=50V, Weight=2.3E-05oz, Width=0.02inch
R13: library part CMP-2002-00170-1, Manufacturer="Vishay Dale", Resistance=68K, Part Number=CRCW040268K0FKED
R14: "Resistor", Manufacturer_Name=Vishay, Mouser Part Number=71-CRCW0402180KFKED, Arrow Part Number=CRCW0402180KFKED, Arrow Price/Stock=https://www.arrow.com/en/products/crcw0402180kfked/vishay, Datasheet Link=http://www.vishay.com/docs/20035/dcrcwe3.pdf, Height=0.4mm, Manufacturer_Part_Number=CRCW0402180KFKED, Mouser Price/Stock=https://www.mouser.co.uk/ProductDetail/Vishay-Dale/CRCW0402180KFKED?qs=QPqDnsKvzKeCvZvZQylUHg%3D%3D
R17: library part CMP-2002-07353-1, Manufacturer="Yageo / Phycomp", Part Number=RC0402FR-0710KL
S1: "Switch", Arrow Part Number="PTS526 SK15 SMTR2 LFS", Manufacturer_Name="C & K COMPONENTS", Mouser Part Number=611-PTS526SK15SMR2L, Arrow Price/Stock=https://www.arrow.com/en/products/pts526-sk15-smtr2-lfs/ck?region=nac, Datasheet Link=https://www.ckswitches.com/media/2780/pts526.pdf, Height=1.65mm, Manufacturer_Part_Number="PTS526 SK15 SMTR2 LFS", Mouser Price/Stock=https://www.mouser.co.uk/ProductDetail/CK/PTS526-SK15-SMTR2-LFS?qs=UXgszm6BlbF5Ezp94JAQtw%3D%3D
U1: library part CMP-05698-000018-1, "IC AMP CLASS D MONO 3.2W 16TQFN", Max Operating Temperature=85°C, Max Output Current=1.6A, Max Output Power=3.2W, Max Power Dissipation=1.666W, Max Supply Voltage=5.5V, Min Operating Temperature=-40°C, Min Supply Voltage=2.5V, Power Supply Rejection Ratio (PSRR)=77dB, Voltage Gain=15dB, Contact Plating=Tin, Mount="Surface Mount", Number of Pins=16, Packaging="Tape and Reel", Radiation Hardening=No, RoHS Compliant=Yes, Series=-
U2: library part CMP-1753-00002-2, "3-Axis Gyroscope, Accelerometer and a Digital Motion Processor(TM) (DMP), 2.375 to 3.46 V, -40 to 85 degC, 24-Pin QFN, RoHS, Tape and Reel", Manufacturer=InvenSense, Standard Package=5,000, Category=Sensors,Transducers, Datasheet URL=http://datasheet.octopart.com/MPU-6050-InvenSense-datasheet-14421344.pdf, Datasheet Version="Rev. 3.3, 05/2012", Dynamic Catalog=MPU-6000™Series, Family=Multifunction, Featured Product=MPU-60506-Axis,IntegratedI²CSolution, Manufacturer URL=http://www.invensense.com/, Online Catalog=MPU-6000™Series, Other Names="1428-1007-2 / MPU6050", Output Type=Digital, Sensor Type=MotionTracking, Unit PriceUSD=Digital
U3: library part CMP-0321-00456-2, "800 mA, Single-Input, Single Cell Li-Ion Battery Charger with Auto Start. Vovp=6.6 V, 3.5 V, -40 to 85 degC, 10-pin SON (DSQ), Green (RoHS & no Sb/Br)", Manufacturer="Texas Instruments", Over Voltage Protection=N, ComponentLink1Description=Datasheet, ComponentLink1URL=http://www.ti.com/general/docs/lit/getliterature.tsp?genericPartNumber=BQ24040&fileType=pdf, DatasheetVersion=SLUS941A, Eco-Plan="Green (RoHS & no Sb/Br)", Lead Acid=N, Li-Ion=N, Li-Polymer=N, Mounting Technology="Surface Mount", NiCd=N, NiMH=N, PackageDescription="10-Pin Plastic Small Outline No-Lead, 2 x 2 x 0.8 mm Body, 0.4 mm Pitch, Exposed Pad", PackageReference=DSQ0010A, PackageVersion="revB, Apr-2010", PartNumber=BQ24040DSQR, SubFamily="Battery Charge Management", Vin(Min)(V)=3.5
U4: "Bluetooth, WiFi 802.11b/g/n, Bluetooth v5.0 Transceiver Module 2.4GHz Antenna Not Included, U.FL Surface Mount", Package="VFQFN-56 Espressif Systems", Check_prices=https://www.snapeda.com/parts/ESP32-S3-MINI-1U-N8/Espressif+Systems/view-part/?ref=eda, MF="Espressif Systems", MP=ESP32-S3-MINI-1U-N8, SnapEDA_Link=https://www.snapeda.com/parts/ESP32-S3-MINI-1U-N8/Espressif+Systems/view-part/?ref=snap
Y1: "Crystal or Oscillator", Manufacturer_Name=ABRACON, Mouser Part Number=815-AMDLA4020Q-1R5MT, Datasheet Link=https://abracon.com/datasheets/AMDLA4020Q.pdf, Height=2mm, Manufacturer_Part_Number=AMDLA4020Q-1R5MT, Mouser Price/Stock=https://www.mouser.co.uk/ProductDetail/ABRACON/AMDLA4020Q-1R5MT?qs=7MVldsJ5Uax4YduHzChsEg%3D%3D

## Free pads (board coordinates)
  rect 2.524x1.524 hole 0.762: 2(93.425,53.775) 3(93.525,56.2)
  rect 1.2x1.2 all layers, no hole mask+0.05: 4(110.025,56.375) 4(110.025,58.025)
  rect 1.524x1.824 smd far side: 10(104.775,61.525) 10(104.787,59.188) 10(106.925,59.15) 10(106.958,61.525)

## Via types
v1: diameter 0.45, hole 0.3, Top Layer to Bottom Layer, tented both sides, 178 vias
v2: diameter 0.5, hole 0.2, Top Layer to Bottom Layer, tented both sides, 4 vias

## Nets (pads, with @x,y where several pads share a name; then routed paths per layer and width w, separated by ;. In a path a pad name is that pad's centre, name@x,y a point inside that pad or via, vN(x,y) a via of type N, cw(c..) or ccw(c..) an arc to the next point about the centre after c; other vN are vias at no path point)
+3.3: 22.2 22.4 C6.1 C8.2 C9.1 C10.1 C11.2 C12.1 C13.1 C25.2 C26.2 C27.1 IC1.2 IC1.6 IC1.8 P1.2 P2.2 P4.5 pad.10@106.958,61.525 R9.2 R10.2 R11.2 U2.8 U2.13 U4.3 | length 12.9
  Top Layer w0.3: v1(106.95,41.55) 106.979,41.579 107.079,41.579 22.2@107.45,41.95 ; v1(106.95,42.325) 106.979,42.296 107.104,42.296 22.2@107.45,41.95 ; R11.2 v1(108.25,65.6) ; 22.2 22.2@107.45,41.95
  Bottom Layer w0.3: v1(100.875,53.025) C6.1 101.45,53.125 101.947,53.125 102.067,53.245 102.62,53.245 U2.8 ; U2.13 103.355,56.005 103.355,56.59 103.89,57.125 C8.2 103.885,57.15 103.885,57.725 v1(103.86,57.75) ; pad.10@106.958,61.525 106.983,61.5 v1(108.075,61.5) ; C9.1 v1(107.475,71.8) ; IC1.8 108.813,68.688 109.313,68.688 v1(109.325,68.7) ; IC1.6 v1(109.325,70.275) ; IC1.2 112.09,69.475 112.295,69.27 112.315,69.27 112.525,69.06 C10.1 112.53,69.045 113.12,69.045 v1(113.125,69.05) ; R10.2 113.687,71.537 113.687,70.338 R9.2 v1(113.7,69.725)
  other v1: 107.7,46.05 107.7,46.825 106.65,47.1 106.65,47.675
+4.2: 22.3 C17.1 C18.2 C19.2 C20.2 C21.2 C24.1 GSM.2 IC2.4 IC2.5 R12.2 R13.2 | length 2.2
  Bottom Layer w0.3: C19.2 100.225,44.255 v1(100.225,43.6) ; v1(101.575,43.625) 101.575,44.255 C20.2 ; C21.2 103.145,44.28 103.41,44.015 103.41,43.781 103.45,43.741 v1(103.45,43.7)
BAT+: C1.1 C16.2 C22.1 C23.1 IC2.1 IC2.10 IC2.11 IC2.12 pad.2 R1.2 R2.2 R15.2 U3.10 | length 22.4
  Top Layer w0.3: C23.1 92.226,42.92 92.05,42.744 92.05,41 93.55,39.5 98.5,39.5 98.845,39.845 98.845,40.748 99.125,41.028 99.125,41.375 99.05,41.45 99.05,41.57 99.02,41.6 IC2.1 ; pad.2 93.925,53.775 94.65,54.5 94.981,54.5 95.157,54.676 95.157,57.095 94.97,57.282 94.576,57.282 94.4,57.458 R2.2 ; v1(97.1,53.2) 97.141,53.2 97.421,53.48 97.562,53.48 97.774,53.692 97.774,54.551 97.175,55.15 R1.2
  Bottom Layer w0.3: v1(97.1,53.2) 97.112,53.188 97.687,53.188 R15.2
BAT_VOLTAGE: R15.1 R16.2 U4.8 | length 16.1
  Top Layer w0.3: U4.8 110.025,47.966 110.075,47.916 v1(110.075,47.875)
  Bottom Layer w0.3: R15.1 98.638,53.162 98.638,52.263 R16.2 98.638,52.237 98.638,51.713 v1(98.65,51.7) 102.1,48.25 108.106,48.25 108.156,48.3 109.625,48.3 110.05,47.875 v1(110.075,47.875)
BOOT: P3.1 U4.4 | length 18
  Top Layer w0.3: U4.4 106.625,49.175 106.846,48.954 106.846,48.854 v1(106.875,48.825)
  SIGNAL w0.3: v1(106.875,48.825) 106.9,48.85 112.388,48.85 113.013,48.225 113.963,48.225 120.2,54.462 P3.1
BUTTON_1: P5.1 U4.19 | length 6.9
  Top Layer w0.3: U4.19 117.225,52.975 117.555,53.305 117.558,53.305 118.951,54.699 118.951,57.191 119.036,57.276 119.036,57.376 P5.1
BUTTON_2: P6.1 U4.20 | length 9.8
  Top Layer w0.3: U4.20 117.075,53.875 117.278,53.875 118.481,55.079 118.481,60.981 118.9,61.4 P6.1
ENABLE: C14.1 C15.2 R11.1 S1.1 U4.45 | length 12
  Top Layer w0.3: U4.45 104.075,63.575 104.405,63.905 104.405,63.908 105.397,64.9 109,64.9 109.56,65.46 S1.1@109.56,66.7 ; R11.1 107.049,65.651 107.049,66.689 C15.2 ; C15.2@107.11,66.74 107.217,66.633 107.217,66.683 107.26,66.725 C14.1@108.285,66.725 ; S1.1 109.525,66.825 109.525,66.75 109.475,66.7 108.51,66.7 108.485,66.675 108.485,66.525 C14.1@108.41,66.6 ; C14.1@108.41,66.6 C14.1 C14.1@108.41,66.6
GND: 22.322 C1.2 C2.2 C3.1 C4.1 C5.2 C6.2 C7.1 C8.1 C9.2 C10.2 C11.1 C12.2 C13.2 C14.2 C15.1 C16.1 C17.2 C18.1 C19.1 C20.1 C21.1 C22.2 C23.2 C24.2 C25.1 C26.1 C27.2 GSM.3 IC1.1 IC1.5 IC1.7 IC2.2 IC2.13 IC2.15 IC2.16 IC2.17 IC2.18 IC2.19 IC2.20 IC2.21 IC2.22 IC2.23 J1.1 J1.2 J1.3 J1.4 J1.A1-B12 J1.B1-A12 P1.1 P2.1 P3.2 P4.6 P5.2 P6.2 pad.3 pad.4 pad.10@104.775,61.525 R3.1 R4.1 R5.1 R7.2 R8.1 R14.2 R16.1 R17.1 S1.3 U1.3 U1.11 U1.15 U1.17 U2.1 U2.9 U2.11 U2.18 U3.3 U3.7 U3.11 U4.1 U4.2 U4.42 U4.43 U4.46 U4.47 U4.48 U4.49 U4.50 U4.51 U4.52 U4.53 U4.54 U4.55 U4.56 U4.57 U4.58 U4.59 U4.60 U4.61_2 U4.61_3 U4.61_4 U4.61_7 U4.61_8 U4.61_9 U4.62 U4.63 U4.64 U4.65 | length 54.3
  Top Layer w0.18: v1(97.264,59.974) 97.29,59.948 U3.7 ; U3.11 U3.3
  Top Layer w0.254: C22.2 95.02,41.48 95.285,41.745 95.285,41.865 95.52,42.1 IC2.13
  Top Layer w0.3: v1(92.675,41.45) 92.69,41.465 93.385,41.465 C23.2 ; v1(94.85,40.875) 94.85,41.43 C22.2 ; v1(95.075,67.8) 95.075,66.625 J1.2 ; v1(95.075,71.7) 95.075,70.555 J1.4 ; v1(96.239,63.824) 96.245,63.818 96.245,63.259 R4.1 ; J1.B1-A12 97.017,66.018 97.017,65.157 v1(97.025,65.15) ; R17.1 97.162,56.387 97.688,56.387 v1(97.7,56.375) ; v1(97.939,63.674) 97.942,63.671 97.942,63.173 R3.1 ; v1(98.089,59.949) 98.159,59.879 98.971,59.879 v1(99,59.85) 99.012,59.862 99.587,59.862 C1.2 ; v1(99.525,39.675) C16.1 ; C2.2 v1(100.9,62.7) ; v1(101.6,46.4) 101.6,45.745 C18.1 ; R14.2 102.062,41.363 102.588,41.363 v1(102.6,41.375) ; C24.2 102.513,43.1 102.875,43.1 v1(102.9,43.075) ; J1.A1-B12 103.418,66.018 103.418,65.207 v1(103.425,65.2) ; v1(103.9,47.675) 104.455,47.675 C12.2 ; C11.1 104.998,46.302 104.998,45.815 v1(105.027,45.786) ; J1.1 105.375,66.655 v1(105.375,67.775) ; J1.3 105.35,70.56 v1(105.35,71.75) ; v1(106.8,44.25) 22.322 ; C15.1 107.113,67.673 107.113,68.213 v1(107.125,68.225) ; C14.2 108.305,67.695 108.845,67.695 v1(108.85,67.7) ; v1(108.35,57.175) 108.35,58 U4.61_3 ; v1(108.375,55.325) U4.61_2 ; C13.2 108.845,47.725 v1(109.387,47.725) ; U4.61_4 v1(110.025,55.55) 110.025,56.375 v1(110.025,57.2) ; U4.61_7 111.7,54.75 v1(111.7,55.55) 111.7,56.35 U4.61_8 111.7,56.4 v1(111.7,57.2) ; S1.3 113.375,66.775 113.575,66.575 v1(113.925,66.575) ; C27.2 116.925,42.785 117,42.71 117.29,42.71 v1(117.318,42.682) ; U4.63 117.032,49.368 117.976,49.368 v1(117.983,49.361) ; U4.64 v1(117.025,64.025) ; C26.1 117.575,39.925 v1(118.005,39.925) ; C25.1 117.425,41.55 v1(118.025,41.55)
  Bottom Layer w0.3: v1(97.675,51.7) R16.1 ; R7.2 v1(98.5,69.7) ; C19.1 C19.1@100.285,45.72 ; v1(100.55,46.35) 100.55,45.985 C19.1@100.285,45.72 ; C7.1 101.146,55.536 101.146,56.096 v1(101.175,56.125) ; v1(101.35,51.575) C6.2 ; C20.1@101.6,45.77 v1(101.6,46.4) ; v1(101.728,53.709) 101.769,53.709 101.804,53.745 102.62,53.745 U2.9 ; R5.1 101.838,68.987 101.838,69.638 v1(101.85,69.65) ; v1(101.869,54.859) 101.898,54.83 101.992,54.83 102.067,54.755 102.62,54.755 U2.11 ; v1(103.05,46.375) 103.05,45.745 C21.1 C19.1@100.285,45.72 ; pad.10@104.775,61.525 v1(105.675,61.525) ; C8.1 104.936,57.171 105.456,57.171 v1(105.485,57.2) ; U2.1 105.865,51.985 105.865,51.44 v1(105.879,51.425) ; U2.18 105.863,56.013 105.863,56.638 v1(105.875,56.65) ; C9.2 107.521,70.114 107.521,69.529 v1(107.55,69.5) ; v1(108.375,55.325) 108.404,55.296 108.404,55.096 C5.2 ; IC1.7 v1(109.325,69.475) ; IC1.5 108.813,71.062 109.287,71.062 v1(109.3,71.05) ; v1(111.2,68.225) IC1.1 ; U1.11 113.524,59.925 v1(113.599,60) ; C10.2 112.53,68.055 113.095,68.055 v1(113.1,68.05) ; v1(113.146,55.374) 113.148,55.375 C4.1 C4.1 113.252,56.062 114.325,56.062 C3.1 ; U1.15 114.15,60.05 v1(114.2,60) ; v1(114.2,59.386) 114.239,59.425 U1.3 ; v1(115.95,61.125) 115.979,61.096 116.279,61.096 R8.1
  other v1: 92,38 94,38 96,38 98,38 100,38 102,38 104,38 106,38 108,38 122,38 124,38 96.889,40.467 97.489,40.467 98.089,40.467 106,42 95,44 111,44 96.872,45.767 97.472,45.767 98.072,45.767 92,46 104,46 110,46 112,46 114,46 124,46 96.872,46.367 97.472,46.367 98.072,46.367 101,48 92,50 98,50 95,52 109,52 113,52 119,52 108,54 116,54 122,54 124,54 107,56 92,58 102,58 124,58 113.599,59.386 93,60 101,60 121,60 123,60 92,62 94,62 102,62 110,62 124,62 93,64 95,64 92,66 124,66 93,68 97,68 101,68 103,68 117,68 92,70 100,70 110,70 124,70 93,72 97,72 99,72 101,72 103,72 111,72 115,72
GPS_RX: pad.10@106.925,59.15 U4.34 | length 8.4
  Top Layer w0.3: v1(108.075,59.52) 109.773,59.52 113.095,62.842 113.095,62.845 113.375,63.125 113.375,63.325 U4.34
  Bottom Layer w0.3: pad.10@106.925,59.15 107.295,59.52 v1(108.075,59.52)
GPS_TX: pad.10@104.787,59.188 U4.33 | length 11.6
  Top Layer w0.3: v1(105.768,59.2) 107.332,59.2 107.587,58.945 110.048,58.945 113.945,62.842 113.945,62.845 114.225,63.125 114.225,63.325 U4.33
  Bottom Layer w0.3: pad.10@104.787,59.188 104.8,59.2 v1(105.768,59.2)
GSM_RING: GSM.5 U4.16 | length 9.4
  Top Layer w0.3: U4.16 118.075,50.425 118.7,49.8 118.7,47.722 120.647,45.775 121.815,45.775 GSM.5
GSM_RXD: GSM.1 U4.13 | length 14.5
  Top Layer w0.3: U4.13 114.275,47.275 118.55,43 118.55,42.375 119.076,41.849 119.076,41.574 119.625,41.025 121.875,41.025 122.252,40.648 122.252,40.258 GSM.1
GSM_SLEEP: GSM.6 U4.15 | length 6.6
  Top Layer w0.3: U4.15 116.006,49.344 116.006,48.769 120.01,44.765 GSM.6
GSM_TXD: GSM.4 U4.14 | length 9.3
  Top Layer w0.3: U4.14 115.125,47.975 120.055,43.045 120.055,42.455 GSM.4
MIC_LR: P4.2 U4.11 | length 9.3
  Top Layer w0.3: v1(112.55,47.875) 112.563,47.887 112.563,49.362 U4.11
  Bottom Layer w0.3: v1(112.55,47.875) 112.579,47.846 113.179,47.846 113.375,47.65 P4.2
MIC_SCK: P4.3 U4.10 | length 14.8
  Top Layer w0.3: v1(111.7,47.875) 111.712,47.887 111.712,49.362 U4.10
  Bottom Layer w0.3: v1(111.7,47.875) 111.7,47.916 112.077,48.293 112.077,48.665 112.158,48.746 112.158,48.958 113.104,49.904 115.643,49.904 116.998,51.26 121.755,51.26 P4.3
MIC_SD: P4.4 U4.12 | length 8.5
  Top Layer w0.3: v1(113.425,48.8) U4.12
  Bottom Layer w0.3: v1(113.425,48.8) 113.975,48.25 118.345,48.25 P4.4
MIC_WS: P4.1 U4.9 | length 14.5
  Top Layer w0.3: v1(110.8,47.875) 110.8,47.916 110.875,47.991 U4.9
  Bottom Layer w0.3: v1(110.8,47.875) 112.095,46.58 120.728,46.58 121.798,47.65 P4.1
NetC3_2: C3.2 C4.2 U1.7 U1.8
NetC5_1: C5.1 U2.20 | length 1.1
  Bottom Layer w0.3: U2.20 106.58,54.745 107.645,54.745 C5.1
NetC7_2: C7.2 U2.10 | length 1.6
  Bottom Layer w0.3: C7.2 101.1,54.494 101.31,54.284 101.966,54.284 101.995,54.255 102.62,54.255 U2.10
NetC28_1: C28.1 R13.1 | length 5.3
  Top Layer w0.3: R13.1 101.224,41.976 102.812,41.976 103.175,41.613 103.175,40.576 102.849,40.25 C28.1
NetC28_2: C28.2 IC2.3@98.9,42.6 R12.1 R14.1 | length 3.9
  Top Layer w0.3: IC2.3@98.9,42.6 99.696,42.6 99.873,42.423 R12.1@99.877,42.423 ; R12.1 R12.1@99.877,42.423 ; C28.2 100.986,40.286 100.986,41.311 100.796,41.5 100.458,41.5 99.961,41.996 99.961,42.339 R12.1@99.877,42.423
NetIC2_6: IC2.3@98.9,44.1 IC2.7 Y1.2
NetIC2_8: IC2.8 IC2.9 Y1.1
NetJ1_A5: J1.A5 R5.2 | length 2.2
  Top Layer w0.2: J1.A5 101.51,66.075 101.51,66.587 101.54,66.617 101.54,66.972 101.825,67.257 v1(101.825,67.325)
  Bottom Layer w0.2: v1(101.825,67.325) R5.2
NetJ1_B5: J1.B5 R7.1 | length 2
  Top Layer w0.2: J1.B5 98.493,66.058 98.493,67.343 v1(98.525,67.375)
  Bottom Layer w0.2: R7.1 98.525,68 v1(98.525,67.375)
NetLED1_1: LED1.1 U3.5 | length 1.7
  Top Layer w0.2: LED1.1 95.575,60.725 96.758,60.725 96.781,60.748 96.875,60.748 96.89,60.763 U3.5
NetLED1_2: LED1.2 R2.1 | length 1.6
  Top Layer w0.2: R2.1@94.45,59.425 R2.1 94.4,60.025 94.6,60.225 94.6,60.7 LED1.2
NetLED2_1: LED2.1 U3.8 | length 2.9
  Top Layer w0.2: LED2.1 95.983,57.325 95.883,57.425 95.883,57.633 96.388,58.138 97.348,58.138 97.675,58.465 97.675,58.883 U3.8
NetLED2_2: LED2.2 R1.1 | length 1.7
  Top Layer w0.2: LED2.2 95.955,56.575 95.855,56.475 95.855,55.97 96.167,55.658 96.167,55.183 R1.1
NetP7_1: P7.1 U1.9 | length 14.5
  Bottom Layer w0.3: U1.9 112.137,58.925 112.107,58.955 111.778,58.955 111.175,59.558 111.175,64.675 115.85,69.35 P7.1
NetP7_2: P7.2 U1.10 | length 17.1
  Bottom Layer w0.3: U1.10 112.225,59.425 112.195,59.455 111.942,59.455 111.7,59.697 111.7,62.775 114.8,65.875 115.975,65.875 118.4,68.3 118.4,70.515 P7.2
NetR3_2: R3.2 U3.2 | length 1.4
  Top Layer w0.2: R3.2 97.944,61.706 98.075,61.575 98.075,61.013 U3.2
NetR4_2: R4.2 U3.4 | length 1.8
  Top Layer w0.2: R4.2 96.25,62.275 96.79,61.735 96.971,61.735 97.275,61.431 97.275,61.013 U3.4
NetR6_2: R6.2 U1.4 | length 1.2
  Bottom Layer w0.2: U1.4 116.475,58.925 R6.2
NetR8_2: R8.2 U1.2 | length 1.2
  Bottom Layer w0.2: U1.2 116.225,59.925 116.4,60.1 R8.2
NetR17_2: R17.2 U3.9 | length 1.9
  Top Layer w0.2: R17.2 97.15,57.375 98.105,58.33 98.105,58.883 U3.9
SCL: IC1.4 P1.4 P2.4 R10.1 U2.23 U4.17 | length 48.7
  Top Layer w0.3: v1(107.3,53.3) 114.2,53.3 v1(116.212,51.288) 117.012,51.288 U4.17
  SIGNAL w0.3: v1(116.212,51.288) 118.451,53.526 118.451,64.763 119.467,65.78 120.393,65.78 121.494,66.881 121.494,70.634 P1.4
  Bottom Layer w0.2: IC1.4 111.675,71.55 R10.1
  Bottom Layer w0.3: U2.23 106.58,53.255 107.214,53.255 107.259,53.3 v1(107.3,53.3) ; IC1.4@111.188,71.088 IC1.4 ; R10.1 112.85,71.675 112.85,72.35 113.7,73.2 118.68,73.2 P2.4 119.967,71.947 122.807,71.947 P1.4
SDA: IC1.3 P1.3 P2.3 R9.1 U2.24 U4.18 | length 42.7
  Top Layer w0.3: v1(112.1,70.65) 118.69,70.65 P2.3 119.967,69.407 122.807,69.407 P1.3 ; v1(116.213,52.113) 117.013,52.113 U4.18
  SIGNAL w0.3: v1(116.213,52.113) 117.981,53.881 117.981,66.394 119.777,68.19 119.777,69.217 P2.3
  Bottom Layer w0.2: IC1.3 112.7,70.275 R9.1
  Bottom Layer w0.3: U2.24 106.6,52.725 v1@107.115,52.725 ; v1(107.284,52.596) 115.729,52.596 v1(116.213,52.113) ; 112.316,70.525 112.55,70.525 R9.1
SP_BCLK: U1.16 U4.29 | length 2.9
  Top Layer w0.3: v1(116.3,61.8) 116.329,61.771 116.529,61.771 116.825,61.475 U4.29
  Bottom Layer w0.2: U1.16 114.65,61.35 115.1,61.8 v1(116.3,61.8)
SP_DIN: U1.1 U4.32 | length 3
  Top Layer w0.2: U4.32 115.125,63.175 115.3,63 v1(115.3,60.8)
  Bottom Layer w0.2: v1(115.3,60.8) 115.3,60.45 U1.1
SP_LRCLK: U1.14 U4.31 | length 3.4
  Bottom Layer w0.3: U1.14 113.65,61.698 v1(113.671,61.719) 114.252,62.3 115.477,62.3 v1(115.996,62.819)
SP_SD_MODE: R6.1 U4.28 | length 4.6
  Top Layer w0.3: v1(115.8,57.8) 115.8,60.3 116.025,60.525 116.163,60.525 116.263,60.625 U4.28
  Bottom Layer w0.3: v1(115.8,57.8) 115.812,57.813 116.513,57.813 R6.1
USB_D+: J1.A6 J1.B6 U4.24 | length 39.9
  Top Layer w0.3: J1.B6 99.46,66.653 99.43,66.683 99.43,66.733 99.377,66.786 99.377,67.212 99.714,67.549 100.418,67.549 v1(100.972,66.995) 100.943,66.966 100.724,66.966 100.46,66.703 J1.A6 ; v1(116.2,57.1) 116.241,57.1 116.316,57.175 116.975,57.175 U4.24
  SIGNAL w0.3: v1(100.972,66.995) 100.972,64.872 100.275,64.175 100.275,51.575 101,50.85 109.725,50.85 115.946,57.071 116.171,57.071 v1(116.2,57.1)
USB_D-: J1.A7 J1.B7 U4.23 | length 39.7
  Top Layer w0.3: v1(99.952,66.974) 99.952,65.356 100.177,65.13 100.743,65.13 100.96,65.347 J1.B7 ; v1(116.496,56.099) 116.525,56.127 116.577,56.127 116.825,56.375 U4.23
  SIGNAL w0.3: v1(99.952,66.974) 99.95,66.972 99.95,65.12 99.6,64.77 99.6,51.585 101.08,50.105 110.105,50.105 116.099,56.099 v1(116.496,56.099)
USB_IN: C2.1 J1.A4-B9 J1.B4-A9 U3.1
pads on no net: IC2.14 J1. J1.A8 J1.B8 S1.2 S1.4 U1.5 U1.6 U1.12 U1.13 U2.2 U2.3 U2.4 U2.5 U2.6 U2.7 U2.12 U2.14 U2.15 U2.16 U2.17 U2.19 U2.21 U2.22 U2.25 U3.6 U4.5 U4.6 U4.7 U4.21 U4.22 U4.25 U4.26 U4.27 U4.30 U4.35 U4.36 U4.37 U4.38 U4.39 U4.40 U4.41 U4.44
copper on no net:
  other v2: 104.05,53.45 105.15,53.45 104.05,54.55 105.15,54.55

## Polygon pours and split planes (outlines as drawn)
GND on Top Layer "GND_L01_P037" (solid, remove dead copper, pour order 37): 91.313,37.025 125.175,37.025 125.175,74.041 91.313,74.041
BAT+ on Top Layer "BAT+_L01_P004" (solid, pour order 4): 99.4,59.2 100.05,59.2 100.25,59 100.25,53.4 99.525,52.675 92.325,52.675 92.05,52.95 92.05,54.775 92.275,55 95.1,55 97.05,55 98.3,56.25 98.3,59.2 98.4,59.3 98.6,59.3 98.7,59.2
USB_IN on Top Layer "USB_IN_L01_P034" (solid, pour order 34): 102.325,66.625 102.35,66.65 102.9,66.65 102.95,66.6 102.95,64.975 101.725,63.75 99.625,63.75 98.2,65.175 99.8,65.175 100.125,64.85 100.875,64.85 101.25,65.225 102.025,65.225 102.275,65.475 102.275,66.55
USB_IN on Top Layer "USB_IN_L01_P033" (solid, pour order 33): 97.525,66.6 98.1,66.6 98.125,66.575 98.125,65.25 99.625,63.75 99.625,62.375 99.025,61.775 99.025,60.775 98.9,60.65 98.4,60.65 98.35,60.7 98.35,62 98.75,62.4 98.775,62.4 98.775,63.6 97.5,64.875
+4.2 on Top Layer "+4.2_L01_P032" (solid, pour order 32): 108.591,40.3 110.15,40.3 111.375,39.075 118.7,39.075 119.025,39.4 119.025,40.325 119.325,40.625 121.225,40.625 121.5,40.35 121.5,38.275 121,37.775 109.9,37.775 108.7,38.975
+3.3 on Top Layer "+3.3_L01_P030" (solid, pour order 30): 107.075,42.425 107.05,42.425 106.95,42.325 106.95,41.55 107.075,41.425 110.9,41.425 112,40.325 114.65,40.325 114.512,40.462 114.512,43.6 111.95,43.6 111.95,43.575 110.825,42.45
GND on Top Layer "GND_L01_P029" (solid, pour order 29): 96.7,41.975 96.7,41.1 96.55,40.95 96.55,40.225 96.725,40.05 98.3,40.05 98.475,40.225 98.475,40.925 98.3,41.1 98.3,41.975
GND on Top Layer "GND_L01_P028" (solid, pour order 28): 96.7,44.375 96.7,45.375 96.575,45.5 96.575,46.8 96.75,46.975 98.275,46.975 98.45,46.8 98.45,45.525 98.375,45.45 98.3,45.375 98.3,44.375
+4.2 on Top Layer "+4.2_L01_P025" (solid, pour order 25): 103.375,44.875 104.85,44.875 105.225,44.5 105.225,41.25 106.175,40.3 108.65,40.3 108.85,40.1 108.85,39.075 108.75,38.975 108.7,38.975 104.9,38.975 103.625,40.25 103.625,43.675 103.525,43.775 103.375,43.925
+4.2 on Top Layer "+4.2_L01_P019" (solid, pour order 19): 99.475,43.75 99.65,43.925 99.625,43.95 99.625,44.675 99.675,44.725 103.575,44.725 103.625,44.675 103.649,43.849 103.528,43.725 101.9,43.725 101.847,43.673 101.825,42.8 101.775,42.75 101.325,42.75 101.05,43.025 100.175,43.025 100.125,42.975 98.625,42.975 98.575,43.025 98.575,43.675 98.65,43.75 98.725,43.75
BAT+ on Top Layer "BAT+_L01_P018" (solid, pour order 18): 99.175,41.75 99.275,41.65 99.3,41.625 99.875,41.625 99.9,41.6 99.9,40.85 99.875,40.825 99.2,40.825 99.15,40.825 99.125,40.85 99.125,41.425 99.1,41.45 98.65,41.45 98.575,41.525 98.575,41.7 98.625,41.75 98.725,41.75